# Allegro board GALVOSERVODRV2.brd
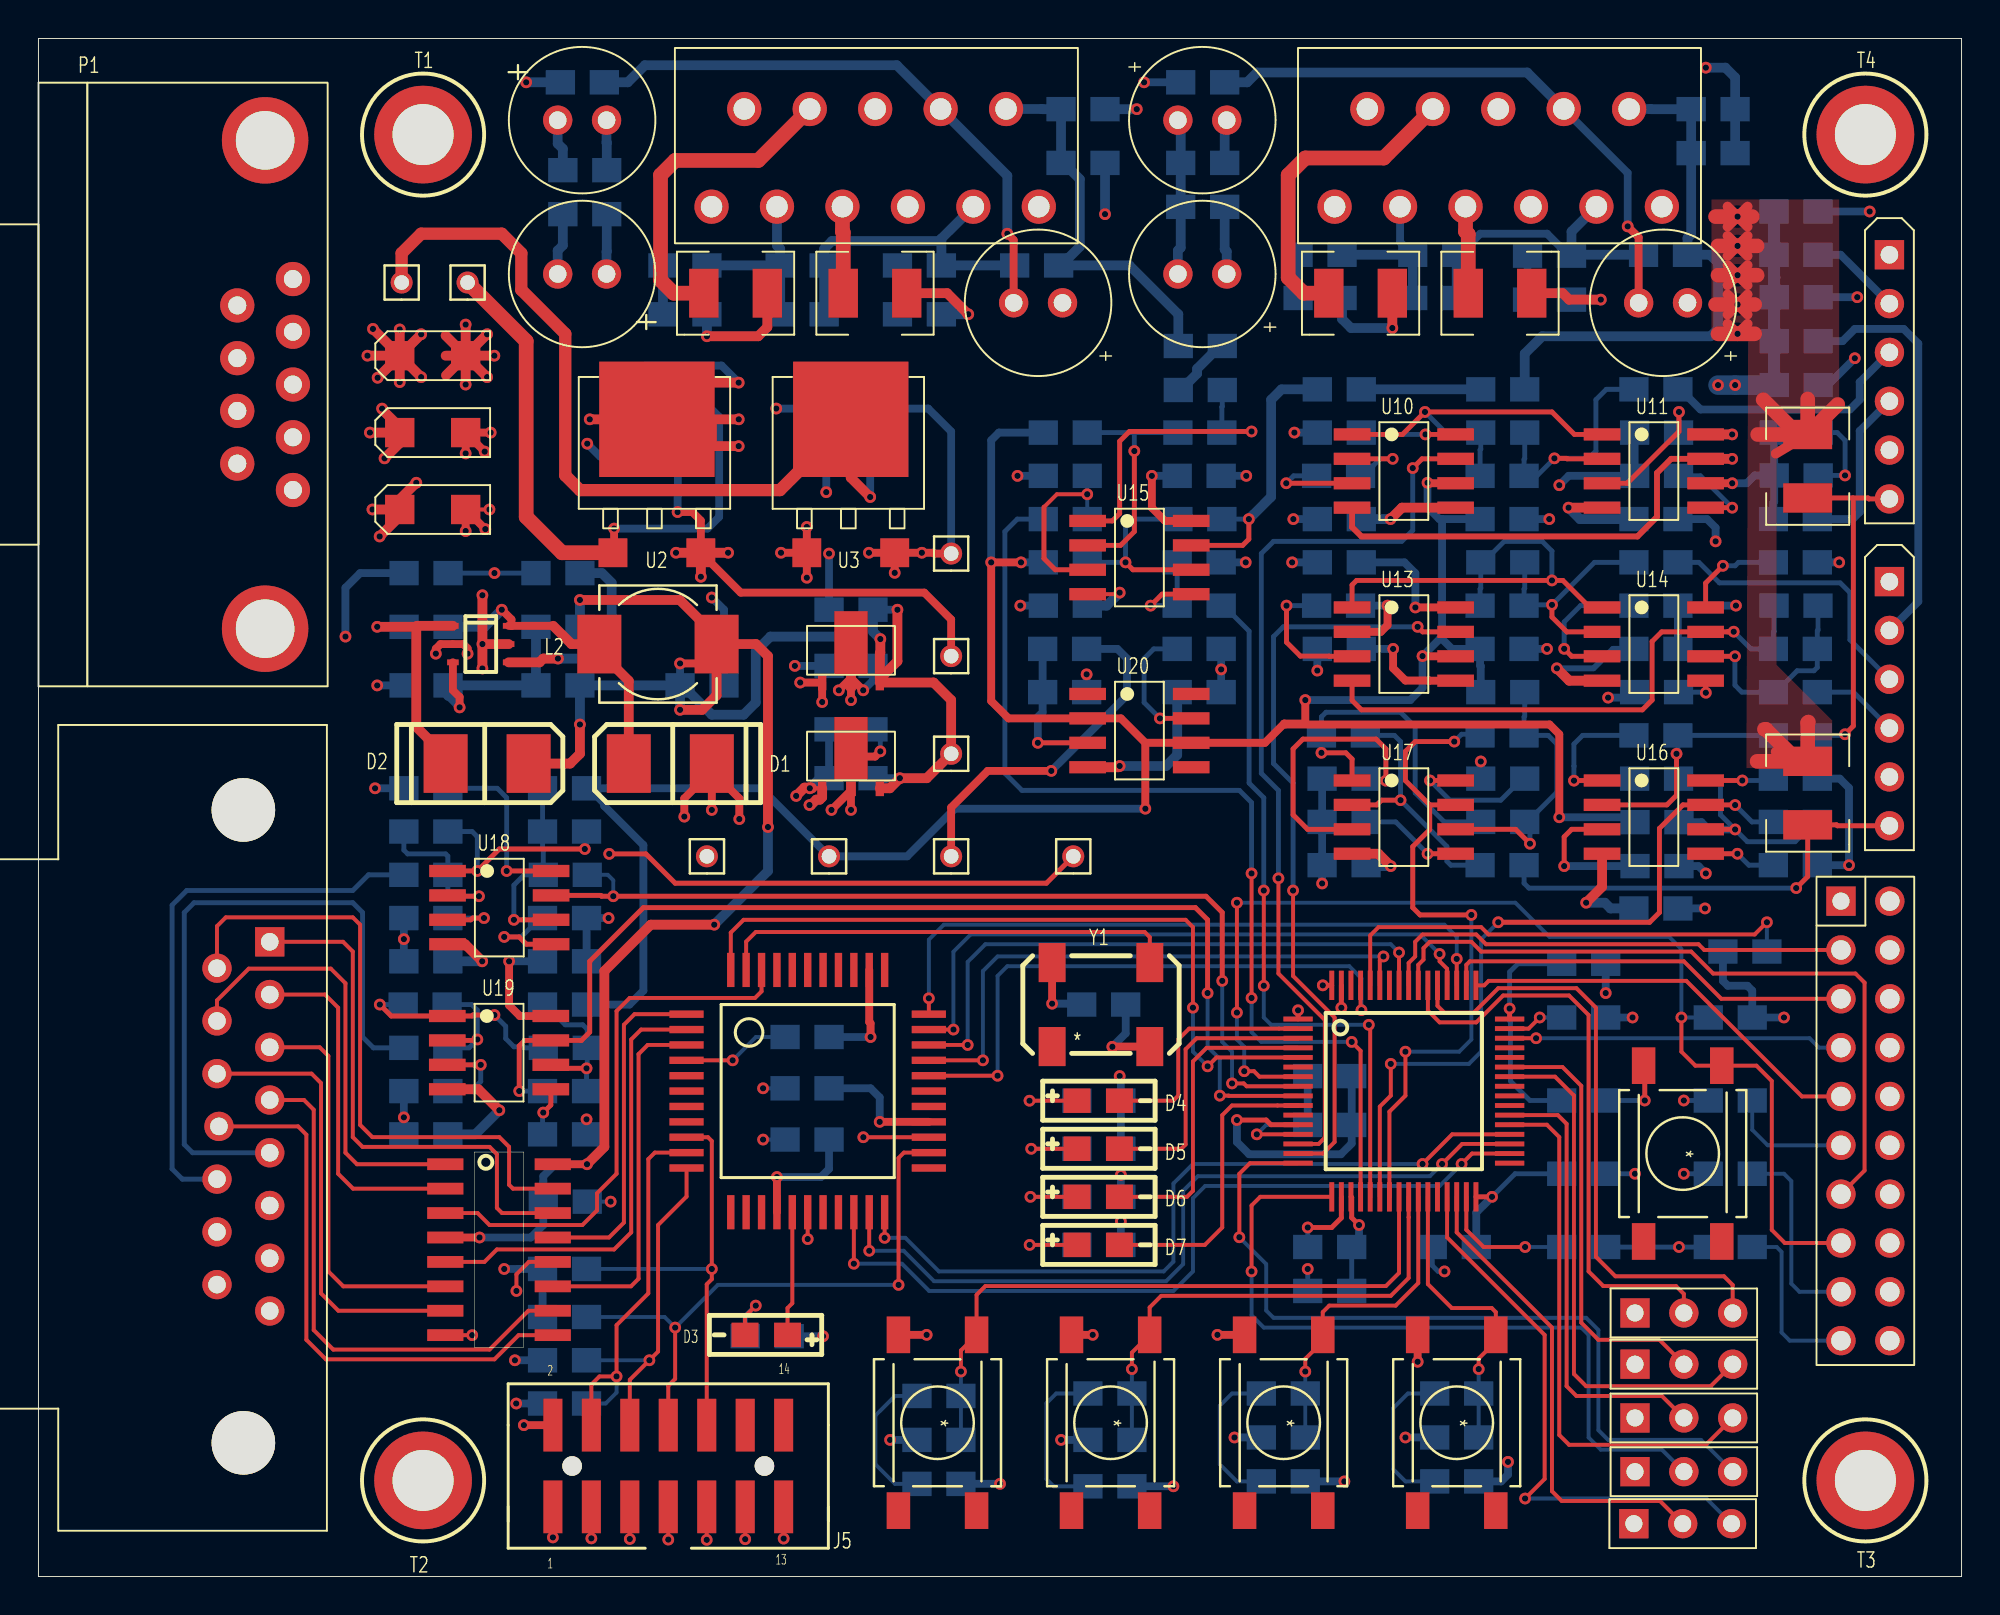
[diagram p0: board, top side]
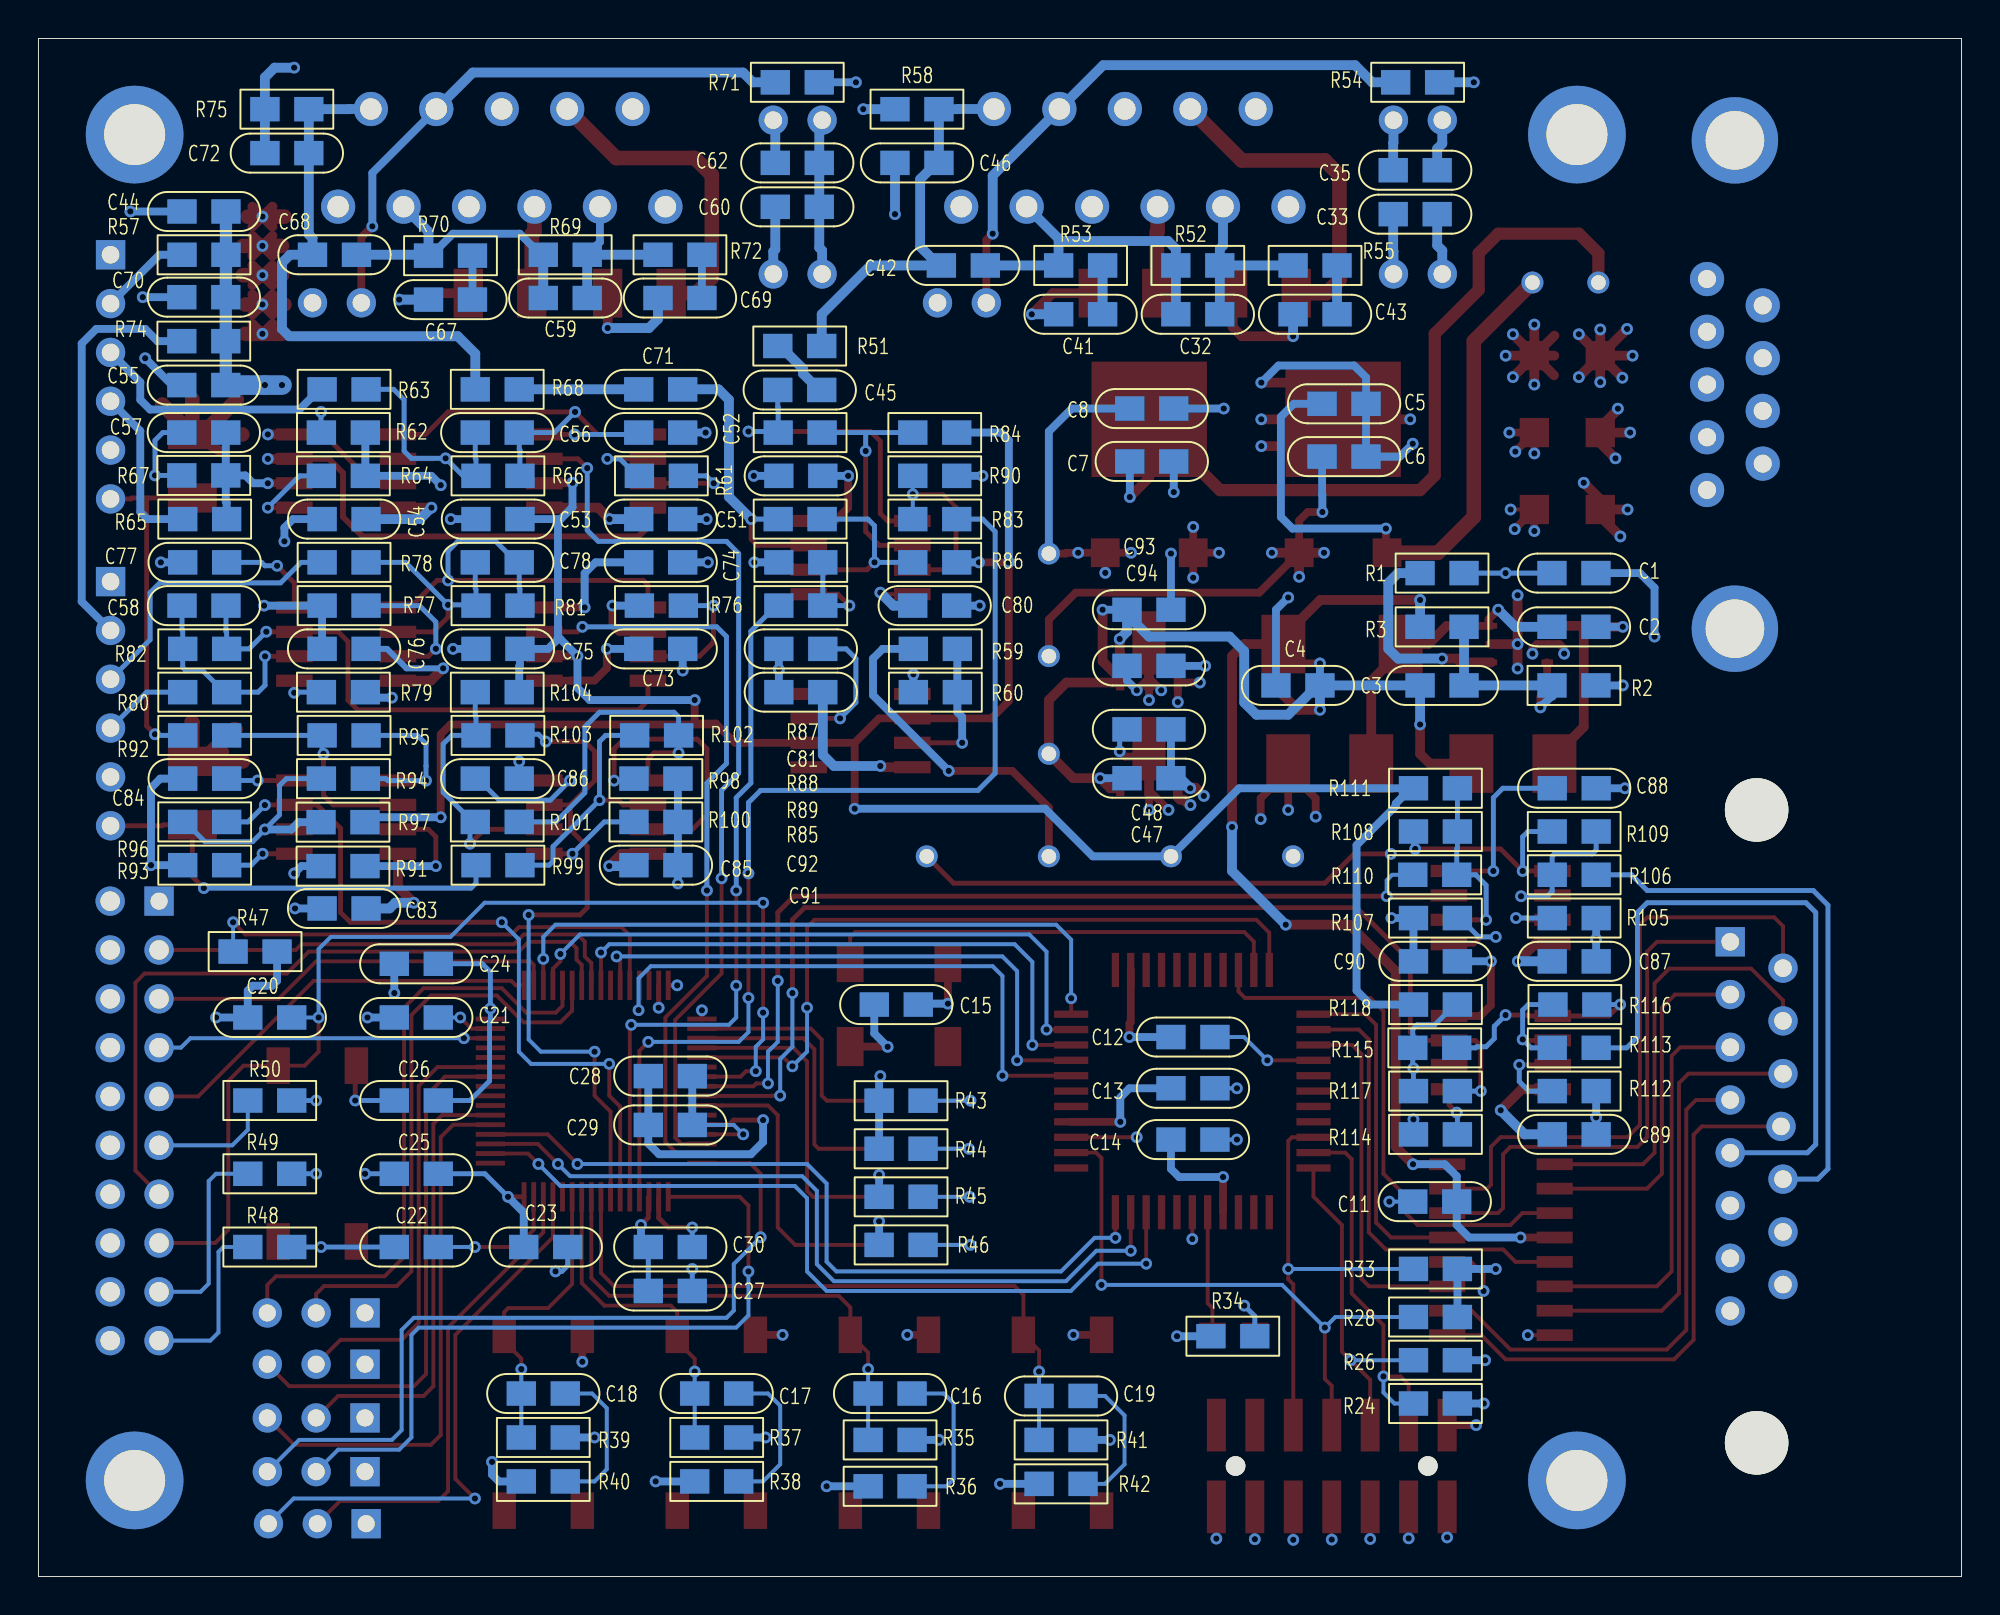
[diagram p1: board, bottom side, seen from below]

Outline 100 x 80 mm; copper layers: TOP, POWER, GND, BOTTOM. Coordinates in mm from the lower left corner of the outline.
Outline path: 0,80 100,80 100,0 0,0 0,80

## Placement (name value [footprint] x y rotation side)
C1  10uF  [0805C]  21.3 52.19 180 bottom
C2  0.01uF  [0805C]  19.01 49.4 0 bottom
C3  1000pF  [0805C]  25.87 46.35 0 bottom
C4  22uF  [0805C]  33.36 46.35 0 bottom
C5  0.1uF  [0805C]  33.25 61 180 bottom
C6  0.1uF  [0805C]  33.25 58.25 180 bottom
C7  0.1uF  [0805C]  43.25 58 180 bottom
C8  0.1uF  [0805C]  43.25 60.75 180 bottom
C11  0.1uF  [0805C]  26.25 19.5 0 bottom
C12  0.1uF  [0805C]  41.11 28.06 180 bottom
C13  0.1uF  [0805C]  41.11 25.39 180 bottom
C14  0.1uF  [0805C]  41.11 22.73 180 bottom
C15  0.1uF  [0805C]  54.25 29.75 0 bottom
C16  0.1uF  [0805C]  54.57 9.52 0 bottom
C17  0.1uF  [0805C]  63.59 9.52 0 bottom
C18  0.1uF  [0805C]  72.61 9.52 0 bottom
C19  0.1uF  [0805C]  45.68 9.39 0 bottom
C20  0.1uF  [0805C]  86.83 29.08 0 bottom
C21  2.2uF  [0805C]  79.21 29.08 0 bottom
C22  2.2uF  [0805C]  79.21 17.14 0 bottom
C23  0.1uF  [0805C]  74.77 17.14 180 bottom
C24  0.1uF  [0805C]  79.21 31.87 0 bottom
C25  0.1uF  [0805C]  79.21 20.95 0 bottom
C26  0.1uF  [0805C]  79.21 24.76 0 bottom
C27  4.7uF  [0805C]  68.29 14.85 180 bottom
C28  0.1uF  [0805C]  66 26.03 0 bottom
C29  1uF  [0805C]  66 23.49 0 bottom
C30  0.1uF  [0805C]  68.29 17.14 180 bottom
C32  15pF  [0805C]  40.86 65.65 180 bottom
C33  0.1uF  [0805C]  29.55 70.86 180 bottom
C34  10uF  [1210]  43.5 66.75 0 top
C35  0.1uF  [0805C]  29.55 73.15 180 bottom
C36  10uF  [1210]  36.25 66.75 180 top
C37  220uF  [CAP2P_D8MM]  29.54 67.75 90 top
C38  220uF  [CAP2P_D8MM]  27 75.75 270 top
C39  100uF  [CAP2P_D8MM]  53.25 66.25 90 top
C41  10uF  [0805C]  46.95 65.65 180 bottom
C42  220pF  [0805C]  53.05 68.19 180 bottom
C43  0.1uF  [0805C]  32.47 65.65 0 bottom
C44  0.1uF  [0805C]  90.25 71 0 bottom
C45  10uF  [0805C]  61.56 61.72 180 bottom
C46  220pF  [0805C]  55.46 73.53 180 bottom
C47  0.1uF  [0805C]  43.4 41.52 180 bottom
C48  0.1uF  [0805C]  43.4 44.06 180 bottom
C51  0.1uF  [0805C]  66.5 55 0 bottom
C52  0.1uF  [0805C]  66.5 59.5 0 bottom
C53  0.1uF  [0805C]  77.25 55 180 bottom
C54  0.1uF  [0805C]  85.25 55 180 bottom
C55  0.1uF  [0805C]  92.55 61.97 180 bottom
C56  22pF  [0805C]  75 59.5 0 bottom
C57  22pF  [0805C]  92.55 59.5 180 bottom
C58  22pF  [0805C]  90.25 50.5 0 bottom
C59  15pF  [0805C]  73.75 66.5 180 bottom
C60  0.1uF  [0805C]  61.68 71.24 180 bottom
C61  10uF  [1210]  76 66.75 0 top
C62  0.1uF  [0805C]  61.68 73.53 180 bottom
C63  10uF  [1210]  68.75 66.75 180 top
C64  220uF  [CAP2P_D8MM]  61.79 67.75 90 top
C65  220uF  [CAP2P_D8MM]  59.25 75.75 270 top
C66  100uF  [CAP2P_D8MM]  85.75 66.25 90 top
C67  10uF  [0805C]  79.72 66.42 180 bottom
C68  220pF  [0805C]  85.75 68.75 180 bottom
C69  0.1uF  [0805C]  65.5 66.5 0 bottom
C70  0.1uF  [0805C]  90.26 66.54 0 bottom
C71  10uF  [0805C]  66.5 61.75 0 bottom
C72  220pF  [0805C]  88.23 74.04 180 bottom
C73  0.1uF  [0805C]  66.5 48.25 0 bottom
C74  0.1uF  [0805C]  66.5 52.75 0 bottom
C75  0.1uF  [0805C]  77.25 48.25 180 bottom
C76  0.1uF  [0805C]  85.25 48.25 180 bottom
C77  0.1uF  [0805C]  92.5 52.75 180 bottom
C78  22pF  [0805C]  75 52.75 0 bottom
C80  0.1uF  [0805C]  52.25 50.5 0 bottom
C81  0.1uF  [0805C]  61.5 57.25 180 bottom
C83  0.1uF  [0805C]  85.25 34.75 180 bottom
C84  0.1uF  [0805C]  92.5 41.5 180 bottom
C85  0.1uF  [0805C]  66.75 37 0 bottom
C86  0.1uF  [0805C]  75 41.5 0 bottom
C87  0.1uF  [0805C]  19 32 0 bottom
C88  0.1uF  [0805C]  19 41 0 bottom
C89  0.1uF  [0805C]  19 23 0 bottom
C90  0.1uF  [0805C]  28.5 32 180 bottom
C91  0.1uF  [0805C]  61.5 46 180 bottom
C92  0.1uF  [0805C]  61.5 48.25 180 bottom
C93  0.1uF  [0805C]  43.4 50.29 180 bottom
C94  0.1uF  [0805C]  43.4 47.37 180 bottom
D1  1N4148W  [SMD_DIODE2]  30.7 42.29 0 top
D2  SS1P3L  [SMD_DIODE2]  25.49 42.29 180 top
D3  LED  [SMD_LED]  38.95 12.57 180 top
D4  LED  [SMD_LED]  54 24.75 0 top
D5  LED  [SMD_LED]  54 22.25 0 top
D6  LED  [SMD_LED]  54 19.75 0 top
D7  LED  [SMD_LED]  54 17.25 0 top
J5  JTAG_CON  [87832-1420]  32.75 5.75 0 top
J6  MCU_JTAG  [IDC20]  95 11 0 top
J7  IRDA  [SIP3]  85.56 8.25 90 top
J8  UART2  [SIP3]  85.56 5.46 90 top
J9  UART3  [SIP3]  85.5 2.75 90 top
J10  UART1  [SIP3]  85.56 11.04 90 top
J11  UART5  [SIP3]  85.56 13.71 90 top
J12  X_MOTOR  [SIP6]  96.25 68.75 0 top
J13  Y_MOTOR  [SIP6]  96.25 51.75 0 top
L2  4.7uH  [INDUC2]  29.16 48.5 0 top
L4  FB  [1206]  20.5 63.5 0 top
L5  FB  [1206]  20.5 55.5 0 top
L6  FB  [1206]  20.5 59.5 0 top
P1  DB9_PowerIN  [DB9HF]  0 62 270 top
P2  XY2-100  [DB15]  12.03 33.01 90 top
R1  100K  [0805R]  25.87 52.19 0 bottom
R2  10K  [0805R]  21.3 46.35 180 bottom
R3  52.3K  [0805R]  25.87 49.4 0 bottom
R24  4.7K  [0805R]  28.5 9 180 bottom
R26  4.7K  [0805R]  28.5 11.25 180 bottom
R28  4.7K  [0805R]  28.5 13.5 180 bottom
R33  4.7K  [0805R]  28.5 16 180 bottom
R34  1K  [0805R]  36.75 12.5 0 bottom
R35  4.7K  [0805R]  56.86 7.11 180 bottom
R36  100  [0805R]  56.86 4.69 180 bottom
R37  4.7K  [0805R]  65.88 7.23 180 bottom
R38  100  [0805R]  65.88 4.95 180 bottom
R39  4.7K  [0805R]  74.89 7.23 180 bottom
R40  100  [0805R]  74.89 4.95 180 bottom
R41  4.7K  [0805R]  47.97 7.11 180 bottom
R42  100  [0805R]  47.97 4.82 180 bottom
R43  100  [0805R]  54 24.75 0 bottom
R44  100  [0805R]  54 22.25 0 bottom
R45  100  [0805R]  54 19.75 0 bottom
R46  100  [0805R]  54 17.25 0 bottom
R47  4.7K  [0805R]  87.59 32.51 0 bottom
R48  10K  [0805R]  86.83 17.14 0 bottom
R49  10K  [0805R]  86.83 20.95 0 bottom
R50  10K  [0805R]  86.83 24.76 0 bottom
R51  1K  [0805R]  61.56 64 180 bottom
R52  10K  [0805R]  40.86 68.19 180 bottom
R53  1K  [0805R]  44.67 68.19 0 bottom
R54  33K  [0805R]  27.14 77.72 0 bottom
R55  10  [0805R]  32.47 68.19 0 bottom
R56  0.2  [1210]  92 57.75 270 top
R57  680  [0805R]  90.25 68.75 0 bottom
R58  33K  [0805R]  55.46 76.32 180 bottom
R59  1K  [0805R]  54.5 48.25 180 bottom
R60  1K  [0805R]  54.5 46 180 bottom
R61  100  [0805R]  68.75 57.25 180 bottom
R62  1K  [0805R]  83 59.5 0 bottom
R63  1K  [0805R]  85.25 61.75 180 bottom
R64  1K  [0805R]  83 57.25 0 bottom
R65  1K  [0805R]  92.5 55 180 bottom
R66  5.6K  [0805R]  77.25 57.25 180 bottom
R67  5.6K  [0805R]  90.26 57.27 0 bottom
R68  1K  [0805R]  75 61.75 0 bottom
R69  10K  [0805R]  73.75 68.75 180 bottom
R70  1K  [0805R]  77.43 68.7 0 bottom
R71  33K  [0805R]  59.4 77.72 0 bottom
R72  10  [0805R]  65.5 68.75 0 bottom
R73  0.2  [1210]  92 40.75 270 top
R74  680  [0805R]  90.26 64.26 0 bottom
R75  33K  [0805R]  88.23 76.32 180 bottom
R76  100  [0805R]  68.75 50.5 180 bottom
R77  1K  [0805R]  85.25 50.5 180 bottom
R78  1K  [0805R]  85.25 52.75 180 bottom
R79  1K  [0805R]  83 46 0 bottom
R80  1K  [0805R]  92.5 46 180 bottom
R81  5.6K  [0805R]  77.25 50.5 180 bottom
R82  5.6K  [0805R]  92.5 48.25 180 bottom
R83  1K  [0805R]  52.25 55 0 bottom
R84  1K  [0805R]  52.25 59.5 0 bottom
R85  1K  [0805R]  61.5 50.5 180 bottom
R86  1K  [0805R]  52.25 52.75 0 bottom
R87  1K  [0805R]  59.25 59.5 0 bottom
R88  1K  [0805R]  59.25 55 0 bottom
R89  1K  [0805R]  61.5 52.75 180 bottom
R90  1K  [0805R]  52.25 57.25 0 bottom
R91  1K  [0805R]  85.31 36.95 180 bottom
R92  1K  [0805R]  92.5 43.75 180 bottom
R93  1K  [0805R]  92.5 37 180 bottom
R94  1K  [0805R]  83 41.5 0 bottom
R95  3K  [0805R]  85.25 43.75 180 bottom
R96  1K  [0805R]  92.5 39.25 180 bottom
R97  1K  [0805R]  83.02 39.24 0 bottom
R98  1K  [0805R]  66.75 41.5 0 bottom
R99  1K  [0805R]  77.25 37 180 bottom
R100  1K  [0805R]  66.75 39.25 0 bottom
R101  1K  [0805R]  75 39.25 0 bottom
R102  3K  [0805R]  69 43.75 180 bottom
R103  1K  [0805R]  77.25 43.75 180 bottom
R104  1K  [0805R]  75 46 0 bottom
R105  1K  [0805R]  19 34.25 0 bottom
R106  3K  [0805R]  19 36.5 0 bottom
R107  1K  [0805R]  28.5 34.25 180 bottom
R108  1K  [0805R]  28.5 38.75 180 bottom
R109  1K  [0805R]  19 38.75 0 bottom
R110  1K  [0805R]  26.25 36.5 0 bottom
R111  1K  [0805R]  28.5 41 180 bottom
R112  1K  [0805R]  19 25.25 0 bottom
R113  3K  [0805R]  19 27.5 0 bottom
R114  1K  [0805R]  28.5 23 180 bottom
R115  1K  [0805R]  26.25 27.5 0 bottom
R116  1K  [0805R]  21.25 29.75 180 bottom
R117  1K  [0805R]  28.5 25.25 180 bottom
R118  1K  [0805R]  28.5 29.75 180 bottom
SW1  PUSHBUTTON  [PUSHBTN_2P]  46.75 8 270 top
SW2  PUSHBUTTON  [PUSHBTN_2P]  55.75 8 270 top
SW3  PUSHBUTTON  [PUSHBTN_2P]  64.75 8 270 top
SW4  PUSHBUTTON  [PUSHBTN_2P]  73.75 8 270 top
SW5  PUSHBUTTON  [PUSHBTN_2P]  85.5 22 270 top
T1  HOLE  [HOLE125]  20 75 0 top
T2  HOLE  [HOLE125]  20 5 0 top
T3  HOLE  [HOLE125]  95 5 0 top
T4  HOLE  [HOLE125]  95 75 0 top
TP1  VDD24V  [TP]  22.31 67.3 0 top
TP2  VDD15V  [TP]  47.46 47.87 0 top
TP3  AGND  [TP]  53.81 37.46 0 top
TP4  VDDN15V  [TP]  47.46 53.21 0 top
TP5  VDDN24V  [TP]  18.89 67.3 0 top
TP6  VDD5V  [TP]  47.46 42.79 0 top
TP7  VREF  [TP]  41.11 37.46 0 top
TP8  VDD3V3  [TP]  34.76 37.46 0 top
TP9  VAA3V3  [TP]  47.46 37.46 0 top
U1  STM32F415RG  [LQFP64]  71 25.25 0 top
U2  MC7815CD2TR4G  [SOT253]  29.87 53.25 0 top
U3  7915/SM  [SOT253]  39.95 53.25 0 top
U4  LM2734YMK  [SOT23-6]  23 48.5 0 top
U6  AM26C32  [SO16]  23.95 17 0 top
U7  XC9572XL_VQ44  [QFP44]  40 25.25 0 top
U8  LM3886/TO220  [TO220-11]  35 71.25 0 top
U9  AMS1117-3.3  [SOT89]  43.75 41 90 top
U10  AD8421  [SO8]  71 57.5 0 top
U11  ADA4077-2  [SO8]  84 57.5 0 top
U12  LM3886/TO220  [TO220-11]  67.4 71.25 0 top
U13  AD8421  [SO8]  71 48.5 0 top
U14  ADA4077-2  [SO8]  84 48.5 0 top
U15  ADA4077-2  [SO8]  57.25 53 0 top
U16  ADA4077-2  [SO8]  84 39.5 0 top
U17  ADA4077-2  [SO8]  71 39.5 0 top
U18  ADA4077-2  [SO8]  23.97 34.79 0 top
U19  ADA4077-2  [SO8]  23.95 27.25 0 top
U20  OP1177  [SO8]  57.25 44 0 top
U21  AMS1117-3.3  [SOT89]  43.75 46.5 90 top
Y1  OSC4_20M  [XTAL_1]  55.25 29.75 0 top

## Library data of the parts
C1-C8 C11-C30 C47 C48 C93 C94 = C
C32 C33 C35 C41-C46 C51-C60 C62 C67-C78 C80 C81 C83-C92 = CAP NP
C34 C36 C61 C63 = CAP POL
C37-C39 C64-C66 = CAP POL: Tolerance: ***; User Part Number: ***
D1 = DIODE
D2 = DIODE SCHOTTKY
D3-D7 = LED
J5 = JTAG_CON
J6 = CON20
J7-J11 = CON3
J12 J13 = CON6: User Part Number: ***
L2 L4-L6 = INDUCTOR
P1 = CONNECTOR DB9
P2 = CONNECTOR DB15_0: User Part Number: ***
R1-R3 R34-R118 = R
R24 R26 R28 R33 = RESISTOR
SW1-SW5 = SW PUSHBUTTON
T1-T4 TP1-TP9 = CON1
U1 = STM32F415RG
U2 = 78XX/SM_1
U3 = 79XX/SM_1
U4 = LM2734
U6 = AM26C32
U7 = XC9572XL_VQ44
U8 U12 = LM3886/TO220_4
U9 U21 = AMS1117
U10 U13 = AD8421
U11 U14-U19 = ADA4077-2
U20 = OP1177
Y1 = OSC4/SM_0

## Footprints (pads in the part's own frame, mm; a bottom-side part is the same pattern mirrored in y, then rotated)
0805C
  rect 1.524x1.27 smd: 1(0,0) 2(2.286,0)
0805R
  rect 1.524x1.27 smd: 1(0,0) 2(2.286,0)
1206
  rect 1.524x1.524 smd: 1(-1.714,0) 2(1.714,0)
1210
  rect 1.524x2.54 smd: 1(-1.651,0) 2(1.651,0)
87832-1420
  round 1.016 hole 1.016 unplated: (-5,0) (5,0)
  rect 0.991x2.743 smd: 1(-6,-2.125) 2(-6,2.125) 3(-4,-2.125) 4(-4,2.125) 5(-2,-2.125) 6(-2,2.125) 7(0,-2.125) 8(0,2.125) 9(2,-2.125) 10(2,2.125) 11(4,-2.125) 12(4,2.125) 13(6,-2.125) 14(6,2.125)
CAP2P_D8MM
  round 1.524 hole 0.914: 1(0,0) 2(0,2.54)
DB9HF
  round 4.496 hole 3.048: (-12.7,11.786) (12.7,11.786)
  round 1.778 hole 0.94: 1(5.486,13.233) 2(2.743,13.233) 3(0,13.233) 4(-2.743,13.233) 5(-5.486,13.233) 6(4.115,10.338) 7(1.372,10.338) 8(-1.372,10.338) 9(-4.115,10.338)
DB15
  round 3.302 hole 3.302 unplated: (-26.06,1.372) (6.858,1.372)
  rect 1.524x1.524 hole 0.914: 1(0,0)
  round 1.524 hole 0.914: 2(-2.743,0) 3(-5.486,0) 4(-8.23,0) 5(-10.973,0) 6(-13.716,0) 7(-16.459,0) 8(-19.202,0) 9(-1.372,2.743) 10(-4.115,2.743) 11(-6.858,2.743) 12(-9.601,2.642) 13(-12.344,2.743) 14(-15.088,2.743) 15(-17.831,2.743)
HOLE125
  round 5.08 hole 3.175: 1(0,0)
IDC20
  rect 1.524x1.524 hole 0.889: 1(-1.27,24.13)
  round 1.524 hole 1.016: 2(1.27,24.13) 3(-1.27,21.59) 4(1.27,21.59) 5(-1.27,19.05) 6(1.27,19.05) 7(-1.27,16.51) 8(1.27,16.51) 9(-1.27,13.97) 10(1.27,13.97) 11(-1.27,11.43) 12(1.27,11.43) 13(-1.27,8.89) 14(1.27,8.89) 15(-1.27,6.35) 16(1.27,6.35) 17(-1.27,3.81) 18(1.27,3.81) 19(-1.27,1.27) 20(1.27,1.27)
INDUC2
  rect 2.286x3.048 smd: 1(0,0) 2(6.096,0)
LQFP64
  rect 1.524x0.254 smd: 1(-5.5,3.749) 2(-5.5,3.249) 3(-5.5,2.749) 4(-5.5,2.249) 5(-5.5,1.75) 6(-5.5,1.25) 7(-5.5,0.75) 8(-5.5,0.25) 9(-5.5,-0.25) 10(-5.5,-0.75) 11(-5.5,-1.25) 12(-5.5,-1.75) 13(-5.5,-2.249) 14(-5.5,-2.749) 15(-5.5,-3.249) 16(-5.5,-3.749) 33(5.5,-3.749) 34(5.5,-3.249) 35(5.5,-2.749) 36(5.5,-2.249) 37(5.5,-1.75) 38(5.5,-1.25) 39(5.5,-0.75) 40(5.5,-0.25) 41(5.5,0.25) 42(5.5,0.75) 43(5.5,1.25) 44(5.5,1.75) 45(5.5,2.249) 46(5.5,2.749) 47(5.5,3.249) 48(5.5,3.749)
  rect 0.254x1.524 smd: 17(-3.749,-5.5) 18(-3.249,-5.5) 19(-2.749,-5.5) 20(-2.249,-5.5) 21(-1.75,-5.5) 22(-1.25,-5.5) 23(-0.75,-5.5) 24(-0.25,-5.5) 25(0.25,-5.5) 26(0.75,-5.5) 27(1.25,-5.5) 28(1.75,-5.5) 29(2.249,-5.5) 30(2.749,-5.5) 31(3.249,-5.5) 32(3.749,-5.5) 49(3.749,5.5) 50(3.249,5.5) 51(2.749,5.5) 52(2.249,5.5) 53(1.75,5.5) 54(1.25,5.5) 55(0.75,5.5) 56(0.25,5.5) 57(-0.25,5.5) 58(-0.75,5.5) 59(-1.25,5.5) 60(-1.75,5.5) 61(-2.249,5.5) 62(-2.749,5.5) 63(-3.249,5.5) 64(-3.749,5.5)
PUSHBTN_2P
  rect 1.905x1.219 smd: (4.572,2.032) (4.572,-2.032) 1(-4.572,-2.032) 2(-4.572,2.032)
QFP44
  rect 1.778x0.381 smd: 1(-6.3,4) 2(-6.3,3.2) 3(-6.3,2.4) 4(-6.3,1.6) 5(-6.3,0.8) 6(-6.3,0) 7(-6.3,-0.8) 8(-6.3,-1.6) 9(-6.3,-2.4) 10(-6.3,-3.2) 11(-6.3,-4) 23(6.3,-4) 24(6.3,-3.2) 25(6.3,-2.4) 26(6.3,-1.6) 27(6.3,-0.8) 28(6.3,0) 29(6.3,0.8) 30(6.3,1.6) 31(6.3,2.4) 32(6.3,3.2) 33(6.3,4)
  rect 0.381x1.778 smd: 12(-4,-6.3) 13(-3.2,-6.3) 14(-2.4,-6.3) 15(-1.6,-6.3) 16(-0.8,-6.3) 17(0,-6.3) 18(0.8,-6.3) 19(1.6,-6.3) 20(2.4,-6.3) 21(3.2,-6.3) 22(4,-6.3) 34(4,6.3) 35(3.2,6.3) 36(2.4,6.3) 37(1.6,6.3) 38(0.8,6.3) 39(0,6.3) 40(-0.8,6.3) 41(-1.6,6.3) 42(-2.4,6.3) 43(-3.2,6.3) 44(-4,6.3)
SIP3
  rect 1.524x1.524 hole 0.889: 1(0,2.54)
  round 1.524 hole 0.889: 2(0,0) 3(0,-2.54)
SIP6
  rect 1.524x1.524 hole 0.914: 1(0,0)
  round 1.524 hole 0.914: 2(0,-2.54) 3(0,-5.08) 4(0,-7.62) 5(0,-10.16) 6(0,-12.7)
SMD_DIODE2
  rect 2.286x3.048 smd: 1(0,0) 2(4.318,0)
SMD_LED
  rect 1.4x1.27 smd: 1(0,0) 2(2.21,0)
SO8
  rect 1.905x0.635 smd: 1(-2.692,1.905) 2(-2.692,0.635) 3(-2.692,-0.635) 4(-2.692,-1.905) 5(2.692,-1.905) 6(2.692,-0.635) 7(2.692,0.635) 8(2.692,1.905)
SO16
  rect 1.88x0.61 smd: 1(-2.794,4.445) 2(-2.794,3.175) 3(-2.794,1.905) 4(-2.794,0.635) 5(-2.794,-0.635) 6(-2.794,-1.905) 7(-2.794,-3.175) 8(-2.794,-4.445) 9(2.794,-4.445) 10(2.794,-3.175) 11(2.794,-1.905) 12(2.794,-0.635) 13(2.794,0.635) 14(2.794,1.905) 15(2.794,3.175) 16(2.794,4.445)
SOT23-6
  rect 0.6x0.3 smd: 1(-1.45,0.95) 2(-1.45,0) 3(-1.45,-0.95) 4(1.45,-0.95) 5(1.45,0) 6(1.45,0.95)
SOT89
  rect 0.813x0.432 smd: 1(0,2.997) 3(0,0)
  custom 4.115x1.727 smd: 2(1.651,1.499)
SOT253
  rect 1.5x1.5 smd: 1(0,0) 3(4.571,0)
  rect 6x6 smd: 2(2.285,6.94)
TO220-11
  round 1.778 hole 1.118: 1(0,0) 2(1.702,5.08) 3(3.404,0) 4(5.105,5.08) 5(6.807,0) 6(8.509,5.08) 7(10.211,0) 8(11.913,5.08) 9(13.614,0) 10(15.316,5.08) 11(17.018,0)
TP
  round 1.143 hole 0.762: 1(0,0)
XTAL_1
  rect 1.397x2.032 smd: 1(-2.54,-2.184) 2(2.54,-2.184) 3(2.54,2.184) 4(-2.54,2.184)

## Nets
AGND: C5.2 C6.2 C7.2 C8.2 C28.2 C29.2 C44.2 C51.1 C52.1 C53.1 C54.1 C55.1 C70.2 C73.1 C74.1 C75.1 C76.1 C77.1 C80.1 C81.1 C83.1 C84.1 C85.1 C86.1 C87.1 C88.1 C89.1 C90.1 C91.1 C92.1 C93.2 C94.2 J12.1 J13.1 L6.2 P2.7 P2.8 P2.15 R60.1 R62.1 R64.1 R77.1 R79.1 R89.1 R90.1 R91.1 R93.1 R98.1 R100.1 R105.1 R107.1 R112.1 R114.1 TP3.1 U1.12(VSSA) U2.2(GND) U3.1(GND) U21.1(GND)
DGND: C1.2 C4.2 C11.2 C12.2 C13.2 C14.2 C15.2 C20.2 C21.2 C22.2 C23.2 C24.2 C25.2 C26.2 C27.2 C30.2 C47.2 C48.2 D1.2(A) J5.1 J5.3 J5.5 J5.7 J5.9 J5.11 J5.13 J6.4 J6.6 J6.8 J6.10 J6.12 J6.14 J6.16 J6.18 J6.20 J7.1 J8.1 J9.1 J10.1 J11.1 L5.2 R2.2 R36.1 R38.1 R40.1 R42.1 R43.2 R44.2 R45.2 R46.2 R47.1 R48.1 R49.1 R50.1 SW1.1 SW2.1 SW3.1 SW4.1 SW5.1 U1.18(VSS1) U1.63(VSS2) U4.2(GND) U6.8(GND) U6.12(G\) U7.4(GND1) U7.17(GND2) U7.25(GND3) U9.1(GND) Y1.2(GND)
GND: L4.1 L5.1 L6.1 P1.3 P1.7 P1.8
PGND: C33.2 C34.2 C35.2 C36.1 C37.2 C38.1 C39.1 C41.1 C43.2 C46.1 C60.2 C61.2 C62.2 C63.1 C64.2 C65.1 C66.1 C67.1 C69.2 C72.1 L4.2 R56.1 R58.1 R73.1 R75.1 U8.7(GND) U12.7(GND)
VDD3V3: C12.1 C13.1 C14.1 C15.1 C23.1 C24.1 C25.1 C26.1 C27.1 C30.1 C48.1 J5.2 J6.1 J6.2 R24.2 R26.2 R28.2 R33.2 R34.2 R35.2 R37.2 R39.2 R41.2 TP8.1 U1.1(VBAT) U1.19(VDD1) U1.32(VDD2) U1.48(VDD3) U1.64(VDD4) U7.15(VCCINT1_3V3) U7.26(VCCIO) U7.35(VCCINT2_3V3) U9.2(VOUT) Y1.4(VCC)
VDD5V: C3.2 C4.1 C11.1 C47.1 C93.1 D2.1(ANODE) L2.2 R3.2 TP6.1 U6.4(G) U6.16(VCC) U9.3(VIN) U21.3(VIN)
VDD15V: C1.1 C6.1 C44.1 C52.2 C55.2 C70.1 C74.2 C77.2 C81.2 C84.2 C86.2 C88.2 C90.2 C92.2 R1.1 R57.1 R74.1 TP2.1 U2.3(VOUT) U4.5(VIN) U10.8(V+) U11.8(VDD) U13.8(V+) U14.8(VDD) U15.8(VDD) U16.8(VDD) U17.8(VDD) U18.8(VDD) U19.8(VDD) U20.7(VDD)
VDDN15V: C8.1 C51.2 C54.2 C73.2 C76.2 C80.2 C83.2 C85.2 C87.2 C89.2 C91.2 TP4.1 U3.3(VOUT) U10.5(V-) U11.4(VEE) U13.5(V-) U14.4(VEE) U15.4(VEE) U16.4(VEE) U17.4(VEE) U18.4(VEE) U19.4(VEE) U20.4(VEE)
VDDNP: C7.1 C35.1 C36.2 C38.2 C62.1 C63.2 C65.2 P1.4 P1.5 P1.9 R54.1 R71.1 TP5.1 U3.2(VIN) U8.4(-VCC) U12.4(-VCC)
VDDP: C5.1 C33.1 C34.1 C37.1 C60.1 C61.1 C64.1 P1.1 P1.2 P1.6 TP1.1 U2.1(VIN) U8.1(+VCC1) U8.5(+VCC5) U12.1(+VCC1) U12.5(+VCC5)
ANALOG_POS1: P2.13 R106.1
ANALOG_POS2: P2.5 R113.1
CLK+: P2.1 U6.14(4A)
CLK-: P2.9 U6.15(4B)
CLK_20M: U7.43(FB1_IO5/GCK1) Y1.3(OUT)
INPOS1_M1: R108.1 R109.2 U18.1(OUTA)
INPOS2_M1: R115.1 R116.2 U19.1(OUTA)
JTAG_TCK: J5.6 R26.1 U7.11(TCK)
JTAG_TDI: J5.10 R33.1 U7.9(TDI)
JTAG_TDO: J5.8 R28.1 U7.24(TDO)
JTAG_TMS: J5.4 R24.1 U7.10(TMS)
KEY1: C19.2 R41.1 SW1.2 U1.24(PC4/ADC12_IN14)
KEY2: C16.2 R35.1 SW2.2 U1.25(PC5/ADC12_IN15)
KEY3: C17.2 R37.1 SW3.2 U1.26(PB0/ADC12_IN8/OTG_HS_ULPI_D1)
KEY4: C18.2 R39.1 SW4.2 U1.27(PB1/ADC12_IN9/OTG_HS_ULPI_D2)
LED1: D4.2(ANODE) U1.2(PC13/RTC_OUT)
LED2: D5.2(ANODE) U1.3(PC14/OSC32_IN)
LED3: D6.2(ANODE) U1.4(PC15/OSC32_OUT)
LED4: D7.2(ANODE) U1.10(PC2/ADC123_IN12/OTG_HS_ULPI_DIR)
NRST: C20.1 J6.15 SW5.2 U1.7(NRST)
STATUS+: P2.6
STATUS-: P2.14
SYNC+: P2.2 U6.2(1A)
SYNC-: P2.10 U6.1(1B)
SYS_JTCK: J6.9 U1.49(PA14/JTCK-SWCLK)
SYS_JTDI: J6.5 U1.50(PA15/JTDI)
SYS_JTDO: J6.13 U1.55(PB3/JTDO)
SYS_JTMS: J6.7 U1.46(PA13/JTMS-SWDIO)
SYS_JTRST: J6.3 U1.56(PB4/NJTRST)
UART5_RX: J11.2 U1.54(PD2/UART5_RX)
UART5_TX: J11.3 U1.53(PC12/UART5_TX)
UART6_IRDA_RX: J7.2 U1.38(PC7/USART6_RX)
UART6_IRDA_TX: J7.3 U1.37(PC6/USART6_TX)
USART1_RX: J10.2 U1.43(PA10/USART1_RX)
USART1_TX: J10.3 U1.42(PA9/USART1_TX)
USART2_RX: J8.2 U1.17(PA3/ADC123_IN3/OTG_HS_ULPI_D0)
USART2_TX: J8.3 U1.16(PA2/ADC123_IN2)
USART3_RX: J9.2 U1.30(PB11/I2C2_SDA/USART3_RX/OTG_HS_)
USART3_TX: J9.3 U1.29(PB10/SPI2_SCK/I2C2_SCL/USART3_T)
VAA3V3: C28.1 C29.1 C94.1 R59.1 TP9.1 U1.13(VDDA) U21.2(VOUT)
VREF: C53.2 C75.2 R84.1 R86.1 R97.1 R104.1 R111.1 R118.1 TP7.1 U10.6(REF) U13.6(REF) U20.2(IN-) U20.6(OUT)
X+: P2.3 U6.6(2A)
X-: P2.11 U6.7(2B)
X_COIL: C32.2 J12.5 R52.2 R55.2 U8.3(OUT)
X_ICOIL_M1: R94.1 R95.2 U16.1(OUTA)
X_ICOIL_SAMP: J12.6 R56.2 R92.1
X_LED_DRV: J12.2 R57.2
X_POS1: J12.3 R63.1
X_POS1_M1: C56.1 R66.2 U10.1(IN-) U11.1(OUTA)
X_POS2: J12.4 R65.1
X_POS2_M1: C57.1 R67.2 U10.4(IN+) U11.7(OUTB)
X_VDRV: C45.1 R87.2 U15.1(OUTA)
XY_CLK: U6.13(4Y) U7.1(FB1_IO7/GCK3)
XY_SYNC: U6.3(1Y) U7.42(FB1_IO4)
XY_X: U6.5(2Y) U7.2(FB1_IO8)
XY_Y: U6.11(3Y) U7.3(FB1_IO9)
Y+: P2.4 U6.10(3A)
Y-: P2.12 U6.9(3B)
Y_COIL: C59.2 J13.5 R69.2 R72.2 U12.3(OUT)
Y_ICOIL_M1: R101.1 R102.2 U17.1(OUTA)
Y_ICOIL_SAMP: J13.6 R73.2 R99.1
Y_LED_DRV: J13.2 R74.2
Y_POS1: J13.3 R78.1
Y_POS1_M1: C78.1 R81.2 U13.1(IN-) U14.1(OUTA)
Y_POS2: J13.4 R80.1
Y_POS2_M1: C58.1 R82.2 U13.4(IN+) U14.7(OUTB)
Y_VDRV: C71.1 R88.2 U15.7(OUTB)
N01384: U1.5(PH0/OSC_IN) U7.44(FB1_IO6/GCK2)
N01394: R110.2 U1.8(PC0/ADC123_IN10/OTG_HS_ULPI_STP) U18.7(OUTB)
N01432: R117.2 U1.9(PC1/ADC123_IN11) U19.7(OUTB)
N01436: U1.14(PA0/WKUP/ADC123_IN0) U10.7(OUT)
N01450: U1.15(PA1/ADC123_IN1) U13.7(OUT)
N01460: R96.2 U1.22(PA6/ADC12_IN6) U16.7(OUTB)
N01470: R103.2 U1.23(PA7/ADC12_IN7) U17.7(OUTB)
N01484: R83.1 U1.20(PA4/ADC12_IN4/DAC_OUT1/OTG_HS_S)
N01500: R85.1 U1.21(PA5/ADC12_IN5/DAC_OUT2/OTG_HS_U)
N01536: U1.59(PB7) U7.30(FB2_IO2)
N01552: U1.61(PB8) U7.29(FB2_IO1)
N01906: U1.57(PB5) U7.31(FB2_IO3)
N01922: U1.34(PB13/SPI2_SCK/USART3_CTS/OTG_HS) U7.20(FB4_IO2)
N02048: U1.35(PB14/SPI2_MISO/USART3_RTS/OTG_H) U7.21(FB4_IO3)
N02076: U1.36(PB15/SPI2_MOSI/OTG_HS_DP) U7.22(FB4_IO4)
N02101: U1.51(PC10/UART4_TX) U7.33(FB2_IO5/GSR)
N02126: U1.52(PC11/UART4_RX) U7.32(FB2_IO4)
N03733: C2.2 D1.1(K) L2.1 U4.6(SW)
N03762: C2.1 D2.2(CATHODE) U4.1(BOOST)
N03928: C3.1 R2.1 R3.1 U4.3(FB)
N04387: R1.2 U4.4(EN)
N23740: C16.1 R36.2
N23869: C17.1 R38.2
N24020: C18.1 R40.2
N24186: C19.1 R42.2
N24377: D4.1(CATHODE) R43.1
N24513: D5.1(CATHODE) R44.1
N24639: D6.1(CATHODE) R45.1
N24729: D7.1(CATHODE) R46.1
N25959: J6.11 R50.2
N26047: J6.17 R49.2
N26055: J6.19 R48.2
N26812: R47.2 U1.60(BOOT0)
N30256: C22.1 U1.31(VCAP_1)
N30260: C21.1 U1.47(VCAP_2)
N31293: U1.39(PC8/USART6_CK)
N31323: U1.40(PC9)
N31361: U1.58(PB6)
N31367: U1.62(PB9)
N41724: C42.1 C46.2 R51.2 R58.2 U8.10(+VIN)
N41785: C32.1 C42.2 R52.1 R53.2 U8.9(-VIN)
N42450: C39.2 R54.2 U8.8(MUTE)
N42886: C41.2 R53.1
N43511: C43.1 R55.1
N44248: C45.2 R51.1
N47571: R61.2 U10.3(RG2)
N47575: R61.1 U10.2(RG1)
N51605: C56.2 R63.2 R66.1 U11.2(INA-)
N51627: R62.2 U11.3(INA+)
N51811: C57.2 R65.2 R67.1 U11.6(INB-)
N51820: R64.2 U11.5(INB+)
N53266: R79.2 U14.5(INB+)
N53270: C58.2 R80.2 R82.1 U14.6(INB-)
N53390: C68.1 C72.2 R68.2 R75.2 U12.10(+VIN)
N53418: C59.1 C68.2 R69.1 R70.2 U12.9(-VIN)
N53738: C66.2 R71.2 U12.8(MUTE)
N53816: C67.2 R70.1
N53906: C69.1 R72.1
N54106: C71.2 R68.1
N54378: R76.1 U13.2(RG1)
N54390: R76.2 U13.3(RG2)
N54692: C78.2 R78.2 R81.1 U14.2(INA-)
N54708: R77.2 U14.3(INA+)
N55384: R85.2 R89.2 U15.5(INB+)
N55388: R86.2 R88.1 U15.6(INB-)
N55726: R84.2 R87.1 U15.2(INA-)
N55742: R83.2 R90.2 U15.3(INA+)
N59109: R94.2 R96.1 R97.2 U16.6(INB-)
N59451: R92.2 R95.1 U16.2(INA-)
N59469: R91.2 U16.3(INA+)
N60591: R93.2 U16.5(INB+)
N64012: R101.2 R103.1 R104.2 U17.6(INB-)
N64298: R99.2 R102.1 U17.2(INA-)
N64302: R98.2 U17.3(INA+)
N64396: R100.2 U17.5(INB+)
N66956: R108.2 R110.1 R111.2 U18.6(INB-)
N67246: R106.2 R109.1 U18.2(INA-)
N67260: R105.2 U18.3(INA+)
N67352: R107.2 U18.5(INB+)
N67613: R115.2 R117.1 R118.2 U19.6(INB-)
N67905: R113.2 R116.1 U19.2(INA-)
N67917: R112.2 U19.3(INA+)
N68011: R114.2 U19.5(INB+)
N69360: R59.2 R60.2 U20.3(IN+)
N83156: D3.2(ANODE) R34.1
N83536: D3.1(CATHODE) U7.16(FB3_IO9)
N87179: U1.11(PC3/ADC123_IN13/OTG_HS_ULPI_NXT)

Pads without a net: J5 12 14; T1 1; T2 1; T3 1; T4 1; U1 6 28 33 41 44 45; U7 5 6 7 8 12 13 14 18 19 23 27 28 34 36 37 38 39 40 41; U8 2 6 11; U12 2 6 11; U20 1 5 8; Y1 1

## Via types
v1: diameter 0.61, hole 0.33, TOP to BOTTOM, 332 vias

## Routing (per net, layer and track width the routed paths; a pad name or vN(x,y) marks a point on that pad's centre or on a via; arc(x,y) is an arc through that point)
AGND: length 327.4
  TOP w0.254: TP3.1 52.41,36.06 33.11,36.06 31.59,37.59 v1(29.68,37.59) ; U1.12 64.09,23.5 63.84,23.74 v1(62.32,23.74)
  TOP w0.406: v1(39.61,46.5) U21.1 v1(40.75,45.48) ; 35.02,60.19 34.5,60.19 ; L6.2 v1(23.51,59.5) ; L6.2 v1(23.2,58.51) ; L6.2 v1(22.21,58.41) ; U3.1 v1(39.95,54.59) ; U3.1 v1(38.61,53.25) ; U3.1 v1(39.95,51.95)
  TOP w0.508: v1(36.41,60.19) 35.02,60.19 35.02,58.8 v1(36.41,58.8) ; v1(28.67,60.19) U2.2 34.5,60.19 34.5,62.1 v1(36.41,62.1)
  GND w0.406: 59.02,36.19 57.75,37.46 TP3.1
  GND w0.508: 40.59,53.73 v1(41.11,53.21) ; v1(41.11,53.21) 41.63,53.73 ; v1(41.11,53.21) 40.59,52.69 ; v1(41.11,53.21) 41.63,52.69 ; 11.19,15.72 P2.7 ; P2.7 12.86,17.39 ; P2.7 11.19,17.39 ; P2.7 12.86,15.72 ; v1(36.41,60.19) 36.94,59.67 ; v1(36.41,60.19) 36.94,60.71 ; v1(36.41,60.19) 35.89,59.67 ; v1(36.41,60.19) 35.89,60.71 ; 62.28,57.77 v1(62.81,57.25) ; v1(62.81,57.25) 62.28,56.73 ; v1(62.81,57.25) 63.33,56.73 ; v1(62.81,57.25) 63.33,57.77 ; v1(28.54,58.92) 29.06,59.44 ; v1(28.54,58.92) 28.02,59.44 ; v1(28.54,58.92) 28.02,58.4 ; v1(28.54,58.92) 29.06,58.4 ; v1(17.5,41) 18.03,41.52 ; v1(17.5,41) 18.03,40.48 ; v1(17.5,41) 16.98,41.52 ; v1(17.5,41) 16.98,40.48 ; 35.89,61.58 v1(36.41,62.1) 36.93,61.58 ; 22.68,59.03 v1(23.2,58.51) 23.85,58.51 ; 86.69,54.36 v1(87.21,53.84) ; v1(87.21,53.84) 86.69,53.32 ; v1(87.21,53.84) 87.73,53.32 ; v1(54.5,46.93) 55.03,47.45 ; v1(54.5,46.93) 55.03,46.4 ; v1(54.5,46.93) 53.98,46.4 ; v1(54.5,46.93) 53.98,47.45 ; 93.93,63.89 v1(94.45,63.37) ; v1(94.45,63.37) 94.97,63.89 ; v1(94.45,63.37) 94.97,62.85 ; v1(94.45,63.37) 93.93,62.85 ; v1(94.58,66.54) 95.1,66.02 ; v1(94.58,66.54) 94.06,66.02 ; v1(94.58,66.54) 94.06,67.06 ; v1(94.58,66.54) 95.1,67.06 ; 87.75,51.02 v1(88.27,50.5) ; v1(88.27,50.5) 88.79,51.02 ; v1(88.27,50.5) 88.79,49.98 ; v1(88.27,50.5) 87.75,49.98 ; 21.69,58.94 v1(22.21,58.41) 22.74,58.94 ; v1(38.61,53.25) 39.13,52.73 ; v1(38.61,53.25) 38.09,53.77 ; v1(38.61,53.25) 39.13,53.77 ; v1(38.61,53.25) 38.09,52.73 ; 27.98,23.26 v1(28.5,23.78) ; v1(28.5,23.78) 29.02,24.3 ; v1(28.5,23.78) 27.98,24.3 ; v1(28.5,23.78) 29.02,23.26 ; 66.23,36.57 v1(66.75,36.05) ; v1(66.75,36.05) 67.27,35.53 ; v1(66.75,36.05) 67.27,36.57 ; v1(66.75,36.05) 66.23,35.53 ; v1(23.51,59.5) 24.04,58.98 ; v1(23.51,59.5) 24.04,60.02 ; v1(23.51,59.5) 22.99,60.02 ; 39.43,55.11 v1(39.95,54.59) ; v1(39.95,54.59) 40.48,55.11 ; v1(39.95,54.59) 40.48,54.07 ; v1(39.95,54.59) 39.43,54.07 ; 50.39,56.73 v1(50.91,57.25) ; v1(50.91,57.25) 51.43,56.73 ; v1(50.91,57.25) 51.43,57.77 ; v1(50.91,57.25) 50.39,57.77 ; 78.04,55.52 v1(78.56,55) ; v1(78.56,55) 79.08,54.48 ; v1(78.56,55) 78.04,54.48 ; 60.98,46.66 v1(61.5,47.18) ; v1(61.5,47.18) 60.98,47.7 ; v1(61.5,47.18) 62.02,46.66 ; v1(61.5,47.18) 62.02,47.7 ; v1(93.64,52.75) 94.16,53.27 ; v1(93.64,52.75) 93.12,53.27 ; v1(93.64,52.75) 93.12,52.23 ; v1(93.64,52.75) 94.16,52.23 ; 29.16,38.11 v1(29.68,37.59) ; v1(29.68,37.59) 30.2,38.11 ; v1(29.68,37.59) 29.16,37.07 ; v1(29.68,37.59) 30.2,37.07 ; 39.09,45.98 v1(39.61,46.5) ; v1(39.61,46.5) 40.13,47.02 ; v1(39.61,46.5) 40.13,45.98 ; TP3.1 54.51,36.76 ; TP3.1 53.11,38.16 ; TP3.1 54.51,38.16 ; TP3.1 53.11,36.76 ; v1(66.5,47.12) 67.02,46.6 ; v1(66.5,47.12) 65.98,47.64 ; v1(66.5,47.12) 67.02,47.64 ; v1(66.5,47.12) 65.98,46.6 ; J12.1 97.09,67.91 ; J12.1 95.41,67.91 ; J12.1 97.09,69.59 ; J12.1 95.41,69.59 ; 77.92,48.77 v1(78.44,48.25) 77.92,47.73 ; 12.86,14.65 P2.8 11.19,14.65 ; 86.14,35.27 v1(86.66,34.75) ; v1(86.66,34.75) 87.18,35.27 ; v1(86.66,34.75) 86.14,34.23 ; v1(86.66,34.75) 87.18,34.23 ; 18.48,33.68 v1(19,33.15) ; v1(19,33.15) 19.52,33.68 ; v1(19,33.15) 19.52,32.63 ; v1(19,33.15) 18.48,32.63 ; 81.1,46.24 v1(81.62,45.71) ; v1(81.62,45.71) 82.14,46.24 ; v1(81.62,45.71) 81.1,45.19 ; v1(81.62,45.71) 82.14,45.19 ; v1(86.7,36.57) 87.22,37.09 ; v1(86.7,36.57) 86.18,36.05 ; v1(86.7,36.57) 87.22,36.05 ; v1(86.7,36.57) 86.18,37.09 ; v1(19,23.88) 19.52,23.36 ; v1(19,23.88) 18.48,24.4 ; v1(19,23.88) 18.48,23.36 ; v1(19,23.88) 19.52,24.4 ; 50.54,49.98 v1(51.06,50.5) ; v1(51.06,50.5) 51.58,49.98 ; v1(51.06,50.5) 51.58,51.02 ; v1(51.06,50.5) 50.54,51.02 ; v1(94.15,37) 94.67,36.48 ; v1(94.15,37) 94.67,37.52 ; v1(94.15,37) 93.63,36.48 ; v1(94.15,37) 93.63,37.52 ; v1(38.36,60.75) 38.89,60.23 ; v1(38.36,60.75) 37.84,60.23 ; v1(38.36,60.75) 38.89,61.27 ; v1(38.36,60.75) 37.84,61.27 ; v1(65.19,52.75) 65.71,53.27 ; v1(65.19,52.75) 64.67,53.27 ; v1(65.19,52.75) 64.67,52.23 ; v1(65.19,52.75) 65.71,52.23 ; 39.43,51.43 v1(39.95,51.95) ; v1(39.95,51.95) 39.43,52.47 ; v1(39.95,51.95) 40.48,51.43 ; v1(39.95,51.95) 40.48,52.47 ; 40.23,44.96 v1(40.75,45.48) ; v1(40.75,45.48) 41.27,44.96 ; v1(40.75,45.48) 40.23,46.01 ; P2.15 10.12,16.02 ; P2.15 8.45,16.02 ; P2.15 10.12,14.35 ; P2.15 8.45,14.35 ; 59.02,36.19 59.02,24.38 59.65,23.74 v1(62.32,23.74) ; 29.12,34.77 v1(29.65,34.25) ; v1(29.65,34.25) 29.12,33.73 ; v1(29.65,34.25) 30.17,33.73 ; v1(28.67,60.19) 29.19,59.67 ; v1(28.67,60.19) 28.15,60.71 ; v1(28.67,60.19) 29.19,60.71 ; v1(28.67,60.19) 28.15,59.67 ; 78.56,56.24 v1(79.08,56.76) ; v1(79.08,56.76) 78.56,57.29 ; v1(79.08,56.76) 79.6,57.29 ; 95.41,52.59 J13.1 ; J13.1 97.09,52.59 ; J13.1 95.41,50.91 ; J13.1 97.09,50.91 ; 94.7,70.48 v1(95.22,71) 95.75,70.48 ; v1(65.25,55) 65.78,55.52 ; v1(65.25,55) 65.78,54.48 ; v1(65.25,55) 64.73,55.52 ; v1(65.25,55) 64.73,54.48 ; v1(65.31,59.5) 65.83,60.02 ; v1(65.31,59.5) 64.79,58.98 ; v1(65.31,59.5) 65.83,58.98 ; v1(65.31,59.5) 64.79,60.02 ; 40.44,56.92 v1(40.96,56.4) ; v1(40.96,56.4) 40.44,55.88 ; v1(40.96,56.4) 41.49,56.92 ; v1(40.96,56.4) 41.49,55.88 ; v1(62.78,52.75) 63.3,53.27 ; v1(62.78,52.75) 62.26,52.23 ; v1(62.78,52.75) 63.3,52.23 ; v1(62.78,52.75) 62.26,53.27 ; v1(39.33,47.37) 39.85,47.89 ; v1(39.33,47.37) 38.81,46.84 ; v1(39.33,47.37) 38.81,47.89 ; v1(36.41,58.8) 36.93,58.27 ; v1(36.41,58.8) 36.93,59.32 ; v1(36.41,58.8) 35.89,58.27 ; v1(36.41,58.8) 35.89,59.32 ; v1(75,42.39) 75.52,42.92 ; v1(75,42.39) 74.48,41.87 ; v1(75,42.39) 74.48,42.92 ; v1(75,42.39) 75.52,41.87
  BOTTOM w0.406: C55.1 93.05,61.97 v1(94.45,63.37) ; C83.1 v1(86.66,34.75) ; R90.1 v1(50.91,57.25) ; R91.1 86.32,36.95 v1(86.7,36.57) ; C93.2 v1(41.11,53.21) ; C84.1 93.67,41.5 94.15,41.02 v1(94.15,37) R93.1 ; v1(28.54,58.92) 29.21,58.25 C6.2 C5.2 30.96,62.37 31.59,62.99 35.52,62.99 v1(36.41,62.1) ; v1(66.75,36.05) C85.1 R100.1 R98.1 ; C52.1 v1(65.31,59.5) ; C81.1 v1(62.81,57.25) ; C51.1 v1(65.25,55) ; C91.1 v1(61.5,47.18) C92.1 ; R62.1 R64.1 79.57,57.25 v1(79.08,56.76) ; C70.2 v1(94.58,66.54) ; C28.2 C29.2 68.29,22.52 67.73,21.97 62.95,21.97 62.32,22.6 v1(62.32,23.74) ; R60.1 v1(54.5,46.93) ; C53.1 v1(78.56,55) ; v1(88.27,50.5) R77.1 C76.1 ; C54.1 86.77,55 87.21,54.55 v1(87.21,53.84) ; C90.1 R107.1 v1(29.65,34.25) ; C87.1 v1(19,33.15) R105.1 ; C7.2 v1(40.96,56.4) ; C73.1 v1(66.5,47.12) ; C77.1 v1(93.64,52.75) ; C94.2 v1(39.33,47.37) ; C8.2 v1(38.36,60.75) ; R112.1 v1(19,23.88) C89.1 ; C88.1 v1(17.5,41) ; R114.1 v1(28.5,23.78) ; C44.2 v1(95.22,71) ; R89.1 v1(62.78,52.75) ; R79.1 82.72,45.71 v1(81.62,45.71) ; C80.1 v1(51.06,50.5) ; C74.1 v1(65.19,52.75) ; C86.1 v1(75,42.39) ; C75.1 v1(78.44,48.25)
DGND: length 328.9
  TOP w0.203: U7.4 v1(36.1,26.85) ; v1(40.11,41) U9.1 ; J5.7 v1(32.75,1.92) ; J5.9 v1(34.75,1.91) ; J5.5 v1(30.75,1.95) ; L5.2 v1(23.45,55.5) ; J5.3 v1(28.75,1.99) ; U6.12 25.5,16.36 24.85,15.72 v1(24.85,14.85) ; U6.8 v1(22.55,12.55) ; U7.17 v1(40,17.55) ; J5.11 v1(36.75,1.94) ; J5.13 v1(38.75,1.97) ; U7.25 v1(42.89,22.85) ; J5.1 v1(26.75,2.04)
  TOP w0.254: SW5.1 83.53,26.51 v1(83.53,24.76) ; U1.63 v1(67.75,29.59) ; v1(66,18.16) 67.25,18.16 67.75,18.66 U1.18
  TOP w0.406: v1(22.31,48) 22.31,48.28 22.09,48.5 U4.2 20.91,48.5 20.66,48.25 20.66,48 v1(20.66,48) ; D1.2 35.01,41.9 ; 35.01,41.9 36.44,40.47 v1(36.44,39.4) ; 35.01,41.9 33.58,40.47 v1(33.58,39.53) ; 35.01,41.9 v1(35.01,39.87) ; Y1.2 55.85,27.57 v1(55.84,27.55) ; v1(22.21,54.38) L5.2 v1(23.24,54.48) ; SW4.1 v1(71.72,11.17) ; SW3.1 v1(61.31,12.57) ; SW2.1 v1(54.82,12.57) ; SW1.1 v1(46.19,12.57)
  TOP w0.508: 40.23,41 40.2,41.03 39.83,41.03 v1(39.4,40.6) ; v1(40.09,40.13) 40.17,40.13 40.45,40.41 40.63,40.41 40.75,40.53 U9.1
  GND w0.508: v1(23.24,54.48) 23.76,53.96 ; v1(23.24,54.48) 22.71,53.96 ; v1(23.24,54.48) 22.71,55 ; v1(23.24,54.48) 23.76,55 ; 49.48,5.34 v1(50,4.82) ; v1(50,4.82) 49.48,4.3 ; v1(50,4.82) 50.52,4.3 ; v1(50,4.82) 50.52,5.34 ; 36.23,2.46 v1(36.75,1.94) ; v1(36.75,1.94) 37.27,1.42 ; v1(36.75,1.94) 37.27,2.46 ; v1(36.75,1.94) 36.23,1.42 ; J6.8 96.97,26.81 ; J6.8 96.97,28.21 ; J6.8 95.57,28.21 ; J6.8 95.57,26.81 ; 72.59,16.39 v1(73.11,15.87) ; v1(73.11,15.87) 73.64,15.35 ; v1(73.11,15.87) 72.59,15.35 ; v1(73.11,15.87) 73.64,16.39 ; v1(83.02,20.95) 83.54,21.47 ; v1(83.02,20.95) 83.54,20.43 ; v1(83.02,20.95) 82.5,20.43 ; v1(83.02,20.95) 82.5,21.47 ; v1(66,16) 66.52,16.52 ; v1(66,16) 65.48,15.48 ; v1(66,16) 65.48,16.52 ; v1(66,16) 66.52,15.48 ; v1(30.75,1.95) 31.27,2.48 ; v1(30.75,1.95) 30.23,1.43 ; v1(30.75,1.95) 31.27,1.43 ; v1(30.75,1.95) 30.23,2.48 ; 84.78,16.62 v1(85.31,17.14) ; v1(85.31,17.14) 84.78,17.66 ; v1(85.31,17.14) 85.83,17.66 ; v1(85.31,17.14) 85.83,16.62 ; 95.57,31.89 J6.4 96.97,31.89 ; 81.8,3.91 J9.1 ; J9.1 81.8,1.59 ; J9.1 84.12,1.59 ; J9.1 84.12,3.91 ; 55.7,25.51 v1(56.22,26.03) ; v1(56.22,26.03) 56.74,26.55 ; v1(56.22,26.03) 56.74,25.51 ; v1(56.22,26.03) 55.7,26.55 ; 71.2,11.69 v1(71.72,11.17) ; v1(71.72,11.17) 72.24,11.69 ; v1(71.72,11.17) 72.24,10.65 ; v1(71.72,11.17) 71.2,10.65 ; 39.48,17.03 v1(40,17.55) ; v1(40,17.55) 40.52,17.03 ; v1(40,17.55) 40.52,18.08 ; v1(40,17.55) 39.48,18.08 ; 37.16,25.92 v1(37.68,25.39) ; v1(37.68,25.39) 38.2,24.87 ; v1(37.68,25.39) 38.2,25.92 ; v1(37.68,25.39) 37.16,24.87 ; J6.10 96.97,25.67 ; J6.10 95.57,24.27 ; J6.10 95.57,25.67 ; J6.10 96.97,24.27 ; 15.44,48.37 v1(15.96,48.89) ; v1(15.96,48.89) 15.44,49.41 ; v1(15.96,48.89) 16.49,48.37 ; v1(15.96,48.89) 16.49,49.41 ; 81.86,6.61 J8.1 ; J8.1 84.18,6.61 ; J8.1 84.18,4.3 ; J8.1 81.86,4.3 ; 85.04,24.24 v1(85.56,24.76) ; v1(85.56,24.76) 85.04,25.28 ; v1(85.56,24.76) 86.08,25.28 ; v1(85.56,24.76) 86.08,24.24 ; v1(67.91,4.95) 68.43,5.47 ; v1(67.91,4.95) 68.43,4.43 ; v1(67.91,4.95) 67.39,5.47 ; v1(67.91,4.95) 67.39,4.43 ; v1(17.62,46.35) 18.14,46.87 ; v1(17.62,46.35) 17.09,46.87 ; v1(17.62,46.35) 17.09,45.83 ; v1(17.62,46.35) 18.14,45.83 ; J6.18 96.97,15.51 ; J6.18 95.57,15.51 ; J6.18 96.97,14.11 ; J6.18 95.57,14.11 ; J6.16 96.97,16.65 ; J6.16 95.57,16.65 ; J6.16 95.57,18.05 ; J6.16 96.97,18.05 ; v1(67.75,29.59) 68.27,30.11 ; v1(67.75,29.59) 67.23,30.11 ; v1(67.75,29.59) 67.23,29.06 ; v1(26.75,2.04) 27.27,1.51 ; v1(26.75,2.04) 26.23,1.51 ; v1(26.75,2.04) 26.23,2.56 ; v1(26.75,2.04) 27.27,2.56 ; v1(42.89,22.85) 43.41,22.33 ; v1(42.89,22.85) 42.37,23.37 ; v1(42.89,22.85) 42.37,22.33 ; v1(66,18.16) 66.52,17.63 ; v1(66,18.16) 66.52,18.68 ; v1(66,18.16) 65.48,18.68 ; v1(66,18.16) 65.48,17.63 ; v1(85.56,20.95) 86.08,20.43 ; v1(85.56,20.95) 86.08,21.47 ; v1(85.56,20.95) 85.04,20.43 ; v1(85.56,20.95) 85.04,21.47 ; 37.16,22.21 v1(37.68,22.73) ; v1(37.68,22.73) 38.2,22.21 ; v1(37.68,22.73) 38.2,23.25 ; v1(37.68,22.73) 37.16,23.25 ; v1(35.01,39.87) 35.54,40.39 ; v1(35.01,39.87) 34.49,40.39 ; v1(35.01,39.87) 35.54,39.35 ; v1(35.01,39.87) 34.49,39.35 ; v1(36.1,26.85) 36.62,27.37 ; v1(36.1,26.85) 35.58,26.33 ; v1(36.1,26.85) 35.58,27.37 ; v1(36.1,26.85) 36.62,26.33 ; 24.33,14.33 v1(24.85,14.85) ; v1(24.85,14.85) 25.38,14.33 ; v1(24.85,14.85) 25.38,15.38 ; v1(20.66,48) 21.18,48.52 ; v1(20.66,48) 20.14,48.52 ; v1(20.66,48) 20.14,47.48 ; v1(20.66,48) 21.18,47.48 ; v1(76.42,5.96) 76.94,5.44 ; v1(76.42,5.96) 76.94,6.49 ; v1(76.42,5.96) 75.89,5.44 ; v1(76.42,5.96) 75.89,6.49 ; 22.03,12.03 v1(22.55,12.55) ; v1(22.55,12.55) 23.08,13.08 ; v1(22.55,12.55) 23.08,12.03 ; v1(22.55,12.55) 22.03,13.08 ; 95.57,30.75 J6.6 ; J6.6 96.97,29.35 ; J6.6 95.57,29.35 ; J6.6 96.97,30.75 ; 81.86,9.89 J10.1 ; J10.1 84.18,9.89 ; J10.1 81.86,12.2 ; J10.1 84.18,12.2 ; 95.57,11.57 J6.20 ; J6.20 95.57,12.97 ; J6.20 96.97,12.97 ; J6.20 96.97,11.57 ; 34.49,50.4 v1(35.01,50.92) ; v1(35.01,50.92) 35.54,51.44 ; v1(35.01,50.92) 35.54,50.4 ; 54.3,12.05 v1(54.82,12.57) ; v1(54.82,12.57) 54.3,13.09 ; v1(54.82,12.57) 55.34,12.05 ; v1(54.82,12.57) 55.34,13.09 ; J6.12 96.97,23.13 ; J6.12 96.97,21.73 ; J6.12 95.57,23.13 ; J6.12 95.57,21.73 ; 55.76,20.37 v1(56.29,20.89) ; v1(56.29,20.89) 56.81,20.37 ; v1(56.29,20.89) 56.81,21.41 ; v1(56.29,20.89) 55.76,21.41 ; v1(38.75,1.97) 39.27,2.5 ; v1(38.75,1.97) 38.23,2.5 ; v1(38.75,1.97) 38.23,1.45 ; v1(38.75,1.97) 39.27,1.45 ; 55.76,17.95 v1(56.29,18.47) ; v1(56.29,18.47) 56.81,17.95 ; v1(56.29,18.47) 55.76,19 ; v1(56.29,18.47) 56.81,19 ; 82.37,28.56 v1(82.89,29.08) ; v1(82.89,29.08) 82.37,29.6 ; v1(82.89,29.08) 83.41,29.6 ; v1(82.89,29.08) 83.41,28.56 ; 35.92,38.88 v1(36.44,39.4) ; v1(36.44,39.4) 35.92,39.92 ; v1(36.44,39.4) 36.97,38.88 ; v1(36.44,39.4) 36.97,39.92 ; 40.62,40.65 v1(40.09,40.13) 39.57,39.61 ; 21.69,54.9 v1(22.21,54.38) ; v1(22.21,54.38) 21.69,53.86 ; v1(22.21,54.38) 22.74,53.86 ; v1(22.21,54.38) 22.74,54.9 ; 45.66,13.09 v1(46.19,12.57) ; v1(46.19,12.57) 46.71,13.09 ; v1(46.19,12.57) 46.71,12.05 ; v1(46.19,12.57) 45.66,12.05 ; 39.59,41.52 v1(40.11,41) ; v1(40.11,41) 40.63,41.52 ; v1(40.11,41) 40.63,40.48 ; v1(83.53,24.76) 84.05,24.24 ; v1(83.53,24.76) 84.05,25.28 ; v1(83.53,24.76) 83.01,24.24 ; v1(83.53,24.76) 83.01,25.28 ; 29.23,18.98 v1(29.75,19.5) 30.28,18.98 ; v1(33.58,39.53) 34.11,39 ; v1(33.58,39.53) 33.06,39 ; v1(33.58,39.53) 33.06,40.05 ; v1(33.58,39.53) 34.11,40.05 ; 38.88,40.08 v1(39.4,40.6) 38.88,41.12 ; 21.79,47.48 v1(22.31,48) 21.79,48.52 ; 35.27,2.43 v1(34.75,1.91) 34.23,2.43 ; 58.5,4.17 v1(59.02,4.69) ; v1(59.02,4.69) 58.5,5.22 ; v1(59.02,4.69) 59.54,5.22 ; v1(59.02,4.69) 59.54,4.17 ; J6.14 96.97,19.19 ; J6.14 95.57,20.59 ; J6.14 96.97,20.59 ; J6.14 95.57,19.19 ; 80.97,30.87 v1(81.5,30.35) ; v1(81.5,30.35) 82.02,30.87 ; v1(81.5,30.35) 80.97,29.83 ; v1(81.5,30.35) 82.02,29.83 ; 81.86,9.41 J7.1 ; J7.1 81.86,7.09 ; J7.1 84.18,7.09 ; J7.1 84.18,9.41 ; 32.23,2.44 v1(32.75,1.92) 33.27,2.44 ; 55.32,28.08 v1(55.84,27.55) ; v1(55.84,27.55) 55.32,27.03 ; v1(55.84,27.55) 56.36,28.08 ; v1(55.84,27.55) 56.36,27.03 ; 81.86,14.87 J11.1 ; J11.1 84.18,14.87 ; J11.1 81.86,12.56 ; J11.1 84.18,12.56 ; 90.25,28.56 v1(90.77,29.08) ; v1(90.77,29.08) 91.29,28.56 ; v1(90.77,29.08) 90.25,29.6 ; v1(90.77,29.08) 91.29,29.6 ; 22.93,56.02 v1(23.45,55.5) ; v1(23.45,55.5) 23.97,56.02 ; v1(23.45,55.5) 22.93,54.98 ; v1(23.45,55.5) 23.97,54.98 ; 28.23,2.51 v1(28.75,1.99) ; v1(28.75,1.99) 29.27,2.51 ; v1(28.75,1.99) 28.23,1.46 ; v1(28.75,1.99) 29.27,1.46 ; 60.79,12.05 v1(61.31,12.57) ; v1(61.31,12.57) 60.79,13.09 ; v1(61.31,12.57) 61.83,12.05 ; v1(61.31,12.57) 61.83,13.09
  BOTTOM w0.203: C13.2 v1(37.68,25.39) ; C14.2 v1(37.68,22.73) ; C11.2 v1(29.75,19.5) ; C12.2 37.31,28.06 v1(36.1,26.85)
  BOTTOM w0.254: C27.2 v1(66,16) ; R48.1 v1(85.31,17.14) C22.2 ; C25.2 v1(83.02,20.95) ; C23.2 72.48,16.17 72.78,15.87 v1(73.11,15.87) ; R49.1 v1(85.56,20.95) ; R50.1 v1(85.56,24.76) ; C26.2 v1(83.53,24.76) ; C30.2 v1(66,18.16)
  BOTTOM w0.406: R2.2 v1(17.62,46.35) ; R38.1 v1(67.91,4.95) ; R45.2 v1(56.29,20.89) ; v1(90.77,29.08) C20.2 89.12,30.47 88.86,30.73 87.85,30.73 87.59,30.98 R47.1 ; v1(35.01,50.92) 35.65,50.29 C4.2 ; C15.2 56.54,28.25 v1(55.84,27.55) ; R40.1 76.06,4.95 76.42,5.3 v1(76.42,5.96) ; R44.2 R43.2 56.29,25.97 v1(56.22,26.03) ; v1(15.96,48.89) 15.96,51.43 16.73,52.19 C1.2 ; R42.1 v1(50,4.82) ; C24.2 v1(81.5,30.35) ; C47.2 C48.2 ; R46.2 v1(56.29,18.47) ; R36.1 v1(59.02,4.69) ; C21.2 v1(82.89,29.08)
  BOTTOM w0.508: C47.2 40.63,41.52 v1(40.11,41)
GND: length 86.9
  TOP w0.508: v1(17.23,59.5) L6.1 ; L6.1 18.79,59.78 17.87,60.7 v1(17.87,60.75) ; L6.1 18.79,58.95 v1(18,58.16) ; v1(17.74,54.1) 18.79,55.14 L5.1 ; v1(19.9,62.38) L4.1 ; L4.1 v1(18.79,62.13) ; L4.1 v1(18.79,64.86) ; L4.1 v1(17.64,62.35) ; L4.1 v1(17.39,64.89) ; L4.1 v1(17.11,63.5) ; L4.1 v1(19.9,64.62) ; L5.1 18.79,56.03 v1(19.65,56.89) ; L5.1 v1(17.37,55.5)
  GND w0.508: 12.26,62.97 P1.3 ; P1.3 14.2,61.03 ; P1.3 14.2,62.97 ; P1.3 12.26,61.03 ; 19.38,62.91 v1(19.9,62.38) 19.38,61.86 ; 18.26,64.34 v1(18.79,64.86) ; v1(18.79,64.86) 19.31,64.34 ; v1(18.79,64.86) 18.26,65.39 ; v1(18.79,64.86) 19.31,65.39 ; P1.7 11.31,61.6 ; P1.7 11.31,59.66 ; P1.7 9.37,61.6 ; P1.7 9.37,59.66 ; 9.37,62.4 P1.8 ; P1.8 11.31,64.34 ; P1.8 9.37,64.34 ; P1.8 11.31,62.4 ; 16.87,64.37 v1(17.39,64.89) ; v1(17.39,64.89) 17.92,64.37 ; v1(17.39,64.89) 16.87,65.41 ; v1(17.39,64.89) 17.92,65.41 ; 17.47,58.68 v1(18,58.16) ; v1(18,58.16) 18.52,57.64 ; v1(18,58.16) 18.52,58.68 ; v1(18,58.16) 17.47,57.64 ; 17.12,61.83 v1(17.64,62.35) ; v1(17.64,62.35) 17.12,62.87 ; v1(17.64,62.35) 18.16,62.87 ; v1(17.64,62.35) 18.16,61.83 ; v1(17.23,59.5) 17.76,58.98 ; v1(17.23,59.5) 16.71,58.98 ; v1(17.23,59.5) 17.76,60.02 ; v1(17.23,59.5) 16.71,60.02 ; v1(17.74,54.1) 18.26,53.58 ; v1(17.74,54.1) 17.22,53.58 ; v1(17.74,54.1) 18.26,54.62 ; v1(17.74,54.1) 17.22,54.62 ; v1(17.87,60.75) 18.39,61.27 ; v1(17.87,60.75) 17.35,60.22 ; v1(17.87,60.75) 18.39,60.22 ; v1(17.87,60.75) 17.35,61.27 ; 18.26,61.6 v1(18.79,62.13) ; v1(18.79,62.13) 19.31,61.6 ; v1(18.79,62.13) 19.31,62.65 ; v1(18.79,62.13) 18.26,62.65 ; v1(17.11,63.5) 17.63,64.02 ; v1(17.11,63.5) 17.63,62.98 ; v1(17.11,63.5) 16.59,62.98 ; v1(17.11,63.5) 16.59,64.02 ; v1(17.37,55.5) 17.89,56.02 ; v1(17.37,55.5) 16.85,56.02 ; v1(17.37,55.5) 16.85,54.98 ; v1(17.37,55.5) 17.89,54.98 ; 19.38,65.14 v1(19.9,64.62) 19.38,64.09 ; 19.13,57.41 v1(19.65,56.89) 19.13,56.37
  GND w0.762: P1.8 8.6,63.37 ; P1.8 P1.7 ; P1.8 11.86,63.37 ; P1.3 11.68,62 ; P1.3 13.23,60.77 ; P1.3 15.3,62 ; P1.7 8.53,60.63 ; P1.7 10.34,59.42 ; P1.7 11.97,60.63
PGND: length 186
  TOP w0.508: 87.83,68.69 v1(88.35,69.21) ; v1(88.35,69.21) 87.83,69.73 ; v1(88.35,69.21) 88.88,68.69 ; v1(88.35,69.21) 88.88,69.73 ; C34.2 47.25,66.75 v1(48.35,65.65) ; 90.34,58.4 R56.1 90.34,60.4 ; L4.2 v1(23.71,63.5) ; L4.2 21.18,63.5 ; L4.2 v1(22.21,65.12) ; L4.2 v1(23.33,62.38) ; L4.2 21.19,62.48 ; L4.2 21.17,64.54 ; L4.2 v1(23.33,64.62) ; L4.2 v1(22.21,62) ; 87.83,65.64 v1(88.35,66.16) ; v1(88.35,66.16) 87.83,66.68 ; v1(88.35,66.16) 88.88,65.64 ; v1(88.35,66.16) 88.88,66.68 ; 90.34,43.4 R73.1 90.34,42.9 ; C63.1 v1(70.4,64.94) ; v1(34.76,64.51) 37.43,64.51 37.9,64.98 C36.1 ; 87.83,67.16 v1(88.35,67.69) ; v1(88.35,67.69) 88.88,68.21 ; v1(88.35,67.69) 88.88,67.16 ; v1(88.35,67.69) 87.83,68.21 ; 87.83,71.26 v1(88.35,70.73) ; v1(88.35,70.73) 87.83,70.21 ; v1(88.35,70.73) 88.88,70.21 ; v1(88.35,70.73) 88.88,71.26 ; C61.2 79.26,66.75 79.59,66.42 v1(81.24,66.42) ; 87.83,65.16 v1(88.35,64.64) 88.88,65.16
  TOP w0.762: 93.56,60.96 R56.1 ; R56.1 91.49,59.4 ; R56.1 92,61.25 ; 89.68,61.21 91.49,59.4 ; 91.49,59.4 89.4,59.4 ; 89.37,42.4 91.49,42.4 ; 91.49,42.4 R73.1 92,44.41 92.04,44.44 ; 91.49,42.4 89.83,44.06 89.75,44.06 ; 87.21,66.16 v1(88.35,66.16) 89.24,66.16 ; 89.24,64.64 v1(88.35,64.64) 87.34,64.64 ; 87.21,70.73 v1(88.35,70.73) 89.12,70.73 ; 87.34,69.21 v1(88.35,69.21) 89.37,69.21 ; 87.34,67.69 v1(88.35,67.69) 89.37,67.69
  GND w0.508: 54.94,71.38 v1(55.46,70.86) ; v1(55.46,70.86) 55.98,71.38 ; v1(55.46,70.86) 54.94,70.34 ; v1(55.46,70.86) 55.98,70.34 ; 22.81,64.09 v1(23.33,64.62) ; v1(23.33,64.62) 23.85,64.09 ; v1(23.33,64.62) 23.85,65.14 ; 80.72,65.89 v1(81.24,66.42) ; v1(81.24,66.42) 81.76,66.94 ; v1(81.24,66.42) 80.72,66.94 ; v1(81.24,66.42) 81.76,65.89 ; v1(23.71,63.5) 24.23,62.98 ; v1(23.71,63.5) 23.18,64.02 ; v1(23.71,63.5) 23.18,62.98 ; v1(23.71,63.5) 24.23,64.02 ; 84.91,65.41 C66.1 ; C66.1 84.91,67.09 ; C66.1 86.59,67.09 ; C66.1 86.59,65.41 ; 26.16,66.91 C37.2 ; C37.2 26.16,68.59 ; C37.2 27.84,68.59 ; C37.2 27.84,66.91 ; v1(88.35,66.16) 88.88,66.68 ; v1(88.35,66.16) 87.83,65.64 ; v1(88.35,66.16) 88.88,65.64 ; v1(88.35,66.16) 87.83,66.68 ; 26.16,74.91 C38.1 ; C38.1 27.84,74.91 ; C38.1 26.16,76.59 ; C38.1 27.84,76.59 ; 22.81,61.86 v1(23.33,62.38) ; v1(23.33,62.38) 23.85,62.91 ; v1(23.33,62.38) 23.85,61.86 ; v1(23.33,62.38) 22.81,62.91 ; 56.59,76.84 v1(57.11,76.32) ; v1(57.11,76.32) 57.63,75.8 ; v1(57.11,76.32) 57.63,76.84 ; v1(57.11,76.32) 56.59,75.8 ; 87.83,71.26 v1(88.35,70.73) ; v1(88.35,70.73) 87.83,70.21 ; v1(88.35,70.73) 88.88,71.26 ; v1(88.35,70.73) 88.88,70.21 ; 52.41,65.41 C39.1 ; C39.1 54.09,67.09 ; C39.1 54.09,65.41 ; C39.1 52.41,67.09 ; C64.2 60.09,68.59 ; C64.2 58.41,68.59 ; C64.2 58.41,66.91 ; C64.2 60.09,66.91 ; 35.28,65.03 v1(34.76,64.51) 34.24,65.03 ; 87.83,65.16 v1(88.35,64.64) 88.88,65.16 ; 69.88,64.42 v1(70.4,64.94) ; v1(70.4,64.94) 70.92,65.46 ; v1(70.4,64.94) 70.92,64.42 ; v1(70.4,64.94) 69.88,65.46 ; 87.83,67.16 v1(88.35,67.69) ; v1(88.35,67.69) 87.83,68.21 ; v1(88.35,67.69) 88.88,67.16 ; v1(88.35,67.69) 88.88,68.21 ; 87.83,68.69 v1(88.35,69.21) ; v1(88.35,69.21) 88.88,69.73 ; v1(88.35,69.21) 88.88,68.69 ; v1(88.35,69.21) 87.83,69.73 ; 47.83,66.18 v1(48.35,65.65) ; v1(48.35,65.65) 48.87,66.18 ; v1(48.35,65.65) 47.83,65.13 ; v1(48.35,65.65) 48.87,65.13 ; v1(86.7,78.48) 87.22,79 ; v1(86.7,78.48) 86.18,77.96 ; v1(86.7,78.48) 87.22,77.96 ; v1(86.7,78.48) 86.18,79 ; 44.33,70.37 U8.7 46.09,70.37 ; 21.69,62.52 v1(22.21,62) ; v1(22.21,62) 22.74,62.52 ; v1(22.21,62) 22.74,61.48 ; v1(22.21,62) 21.69,61.48 ; 60.09,76.59 C65.1 58.41,76.59 ; 21.69,65.64 v1(22.21,65.12) ; v1(22.21,65.12) 22.74,65.64 ; v1(22.21,65.12) 21.69,64.6 ; 76.73,70.37 U12.7 78.49,70.37
  GND w0.762: U8.7 45.21,69.05 ; U12.7 77.61,69.26
  BOTTOM w0.508: C33.2 27.27,69.24 27,68.97 C37.2 ; C64.2 59.25,68.97 59.4,69.12 C60.2 C62.2 59.4,75.6 C65.1 ; C69.2 67.79,65.41 68.26,64.94 v1(70.4,64.94) ; C35.2 27.27,74.26 27,74.53 C38.1 ; C72.1 R75.1 88.23,77.97 87.72,78.48 v1(86.7,78.48) ; C46.1 v1(55.46,70.86) ; C41.1 v1(48.35,65.65) ; R58.1 v1(57.11,76.32) ; C67.1 v1(81.24,66.42) ; C43.2 v1(34.76,64.51)
VDD3V3: length 143.3
  TOP w0.254: U1.48 v1(76.5,29.54) ; v1(68.67,18.28) 68.29,18.66 68.29,19.71 U1.19 ; U1.32 v1(75.58,19.75) ; U1.64 v1(66.79,30.75) ; U1.1 v1(65.5,29.45)
  TOP w0.406: 42.25,40.89 v1(42.25,39.87) ; 42.25,40.89 U9.2 43.51,42.65 v1(43.78,42.92) ; 42.25,40.89 v1(41.24,39.87) ; J5.2 v1(25.24,7.87) ; U7.35 43.2,28.84 43.27,28.77 v1(43.27,28.06) ; Y1.4 v1(52.71,29.8) ; U7.15 v1(38.4,20.78) ; U7.26 v1(43.74,23.65)
  POWER w0.508: 68.15,18.8 v1(68.67,18.28) ; v1(68.67,18.28) 69.19,18.8 ; v1(68.67,18.28) 68.15,17.76 ; v1(68.67,18.28) 69.19,17.76 ; TP8.1 36.28,37.46 ; TP8.1 35.46,38.16 ; TP8.1 35.46,36.76 ; 40.72,39.35 v1(41.24,39.87) ; v1(41.24,39.87) 41.76,40.39 ; v1(41.24,39.87) 41.76,39.35 ; 41.73,40.4 v1(42.25,39.87) ; v1(42.25,39.87) 42.77,39.35 ; v1(42.25,39.87) 42.77,40.4 ; v1(42.25,39.87) 41.73,39.35 ; 92.57,36.29 J6.1 ; J6.1 94.89,36.29 ; J6.1 92.57,33.97 ; J6.1 94.89,33.97 ; v1(38.4,20.78) 38.92,20.26 ; v1(38.4,20.78) 37.88,21.3 ; v1(38.4,20.78) 37.88,20.26 ; v1(38.4,20.78) 38.92,21.3 ; v1(62.19,7.23) 62.71,6.71 ; v1(62.19,7.23) 61.67,7.76 ; v1(62.19,7.23) 61.67,6.71 ; v1(62.19,7.23) 62.71,7.76 ; v1(71.08,7.23) 71.6,7.76 ; v1(71.08,7.23) 70.56,7.76 ; v1(71.08,7.23) 70.56,6.71 ; v1(71.08,7.23) 71.6,6.71 ; 42.75,28.58 v1(43.27,28.06) ; v1(43.27,28.06) 43.79,28.58 ; v1(43.27,28.06) 43.79,27.54 ; v1(43.27,28.06) 42.75,27.54 ; v1(75.58,19.75) 76.11,19.23 ; v1(75.58,19.75) 76.11,20.27 ; v1(75.58,19.75) 75.06,20.27 ; v1(75.58,19.75) 75.06,19.23 ; 24.22,15.35 v1(24.22,16) 24.74,16.52 ; 40.28,11.98 v1(40.8,12.5) ; v1(40.8,12.5) 41.32,11.98 ; v1(40.8,12.5) 41.32,13.02 ; v1(40.8,12.5) 40.28,13.02 ; v1(65.5,29.45) 66.02,29.97 ; v1(65.5,29.45) 64.98,28.93 ; v1(65.5,29.45) 66.02,28.93 ; v1(65.5,29.45) 64.98,29.97 ; v1(24.78,11.25) 25.3,11.77 ; v1(24.78,11.25) 24.25,11.77 ; v1(24.78,11.25) 24.25,10.73 ; v1(24.78,11.25) 25.3,10.73 ; v1(66.79,30.75) 67.31,30.23 ; v1(66.79,30.75) 66.26,31.27 ; v1(66.79,30.75) 66.26,30.23 ; v1(66.79,30.75) 67.31,31.27 ; v1(25.24,7.87) 25.76,7.35 ; v1(25.24,7.87) 25.76,8.4 ; v1(25.24,7.87) 24.72,7.35 ; v1(25.24,7.87) 24.72,8.4 ; 52.65,7.63 v1(53.18,7.11) ; v1(53.18,7.11) 53.7,6.59 ; v1(53.18,7.11) 52.65,6.59 ; v1(53.18,7.11) 53.7,7.63 ; 24.32,9.52 v1(24.84,9) ; v1(24.84,9) 25.36,8.48 ; v1(24.84,9) 24.32,8.48 ; v1(24.84,9) 25.36,9.52 ; v1(76.5,29.54) 77.02,29.02 ; v1(76.5,29.54) 75.98,29.02 ; v1(76.5,29.54) 77.02,30.06 ; v1(76.5,29.54) 75.98,30.06 ; 43.76,7.63 v1(44.29,7.11) ; v1(44.29,7.11) 43.76,6.59 ; v1(44.29,7.11) 44.81,6.59 ; v1(44.29,7.11) 44.81,7.63 ; v1(52.71,29.8) 53.23,30.32 ; v1(52.71,29.8) 53.23,29.28 ; v1(52.71,29.8) 52.19,29.28 ; v1(52.71,29.8) 52.19,30.32 ; v1(43.74,23.65) 44.27,24.17 ; v1(43.74,23.65) 44.27,23.13 ; v1(43.74,23.65) 43.22,24.17 ; 95.57,34.43 J6.2 ; J6.2 96.97,34.43 ; J6.2 95.57,35.83 ; J6.2 96.97,35.83 ; 43.26,42.4 v1(43.78,42.92) 43.78,42.27
  BOTTOM w0.254: C27.1 C30.1 ; C25.1 76.78,20.95 v1(75.58,19.75) ; C48.1 43.78,43.68 v1(43.78,42.92) ; C24.1 76.92,31.87 76.5,31.45 v1(76.5,29.54) 76.5,28.91 76.54,28.87 76.54,25.78 77.56,24.76 C26.1
  BOTTOM w0.406: C13.1 43.27,25.39 43.74,24.92 v1(43.74,23.65) ; R39.2 v1(71.08,7.23) ; R35.2 v1(53.18,7.11) ; R41.2 v1(44.29,7.11) ; C23.1 74.77,18.93 v1(75.58,19.75) ; C15.1 54.2,29.8 v1(52.71,29.8) ; R28.2 R33.2 24.93,16 24.93,16 v1(24.22,16) ; C30.1 68.67,17.52 v1(68.67,18.28) ; R37.2 v1(62.19,7.23) ; R24.2 v1(24.84,9) ; v1(38.4,20.78) 40.69,20.78 41.11,21.2 C14.1 ; R26.2 v1(24.78,11.25) ; C12.1 v1(43.27,28.06) ; R34.2 v1(40.8,12.5)
VDD5V: length 114.6
  TOP w0.406: U21.3 43.75,46.69 ; U6.4 v1(22.94,17.63) ; v1(33.36,47.49) 34.25,47.49 L2.2 ; U6.16 v1(28.52,21.44)
  TOP w0.508: L2.2 37.31,48.5 37.94,47.87 v1(37.94,38.98) ; L2.2 35.26,48.88 33.35,50.79 v1(28.16,50.79) ; L2.2 35.26,45.83 34.51,45.08 v1(33.36,45.08) ; v1(35.14,33.9) 31.84,33.9 29.43,31.49 29.43,22.35 v1(28.52,21.44) ; D2.1 27.65,42.29 28.16,42.79 v1(28.16,44.32) ; U9.3 44.27,41 v1(44.79,41.52) 46.19,41.52 TP6.1 47.46,45.59 46.55,46.5 U21.3 ; v1(43.78,48.76) 43.78,48.05 43.75,48.02 43.75,46.69 44.67,47.61 v1(44.67,50.29)
  BOTTOM w0.406: v1(28.52,21.44) 26.87,21.44 26.25,20.82 26.25,20.54 26.25,20.54 C11.1 26.25,19.5 26.25,18.28 25.6,17.63 v1(22.94,17.63) ; C47.1 v1(44.79,41.52) ; 43.4,50.03 C93.1 v1(44.67,50.29) ; v1(33.36,47.49) C4.1
  BOTTOM w0.508: v1(37.94,38.98) 37.94,36.7 v1(35.14,33.9) ; v1(28.16,44.32) C3.2 C4.1 ; R3.2 v1(28.16,50.79) ; v1(43.78,48.76) 43.4,49.14 43.4,50.03 42.25,48.89 38.06,48.89 37.3,48.13 37.3,45.46 36.67,44.83 35.01,44.83 33.49,46.35 C4.1 ; C4.1 v1(33.36,45.08)
VDD15V: length 156.7
  TOP w0.254: U16.8 v1(88.6,41.4) ; U14.8 86.69,51.67 v1(87.59,52.57) ; U10.8 v1(72.12,59.4) ; U17.8 v1(72.36,41.4) ; U20.7 v1(58.32,44.63) ; U18.8 v1(24.35,36.7)
  TOP w0.406: v1(24.47,32) 24.47,29.71 25.03,29.15 U19.8 ; TP2.1 47.46,49.78 46.06,51.18 36.52,51.18 U2.3 34.44,54.92 34,55.37 v1(33.24,55.37) ; v1(57.9,57.25) 57.9,55.59 58.58,54.9 U15.8 ; U13.8 v1(71.6,50.41)
  TOP w0.508: U2.3 v1(34.44,52) ; U2.3 v1(35.86,53.25) ; U2.3 v1(33.15,53.25) ; v1(23.08,48.5) v1(23.08,47.23) ; v1(23.08,48.5) U4.5 ; v1(23.08,48.5) v1(23.08,51.04) ; U11.8 v1(88.07,59.4)
  POWER w0.406: v1(33.24,55.37) 32.35,55.37
  POWER w0.508: 87.55,59.93 v1(88.07,59.4) ; v1(88.07,59.4) 88.6,58.88 ; v1(88.07,59.4) 88.6,59.93 ; v1(88.07,59.4) 87.55,58.88 ; 57.37,56.73 v1(57.9,57.25) ; v1(57.9,57.25) 58.42,57.77 ; v1(57.9,57.25) 57.37,57.77 ; v1(57.9,57.25) 58.42,56.73 ; 23.19,52.71 v1(23.71,52.19) ; v1(23.71,52.19) 24.23,52.71 ; v1(23.71,52.19) 23.19,51.67 ; v1(23.71,52.19) 24.23,51.67 ; v1(24.35,36.7) 24.87,37.22 ; v1(24.35,36.7) 23.82,37.22 ; v1(24.35,36.7) 24.87,36.18 ; v1(24.35,36.7) 23.82,36.18 ; 22.56,49.02 v1(23.08,48.5) ; v1(23.08,48.5) 23.61,49.02 ; v1(23.08,48.5) 23.61,47.98 ; 58.84,45.16 v1(58.32,44.63) 58.84,44.11 ; 22.56,50.52 v1(23.08,51.04) ; v1(23.08,51.04) 23.61,51.56 ; v1(23.08,51.04) 22.56,51.56 ; v1(33.24,55.37) 33.76,55.89 ; v1(33.24,55.37) 32.71,54.85 ; v1(33.24,55.37) 32.71,55.89 ; v1(33.24,55.37) 33.76,54.85 ; 87.07,52.05 v1(87.59,52.57) ; v1(87.59,52.57) 87.07,53.09 ; v1(87.59,52.57) 88.11,52.05 ; v1(87.59,52.57) 88.11,53.09 ; 88.08,41.93 v1(88.6,41.4) ; v1(88.6,41.4) 88.08,40.88 ; v1(88.6,41.4) 89.12,40.88 ; v1(88.6,41.4) 89.12,41.93 ; v1(33.15,53.25) 33.67,53.77 ; v1(33.15,53.25) 32.63,52.73 ; v1(33.15,53.25) 33.67,52.73 ; v1(33.15,53.25) 32.63,53.77 ; v1(23.08,47.23) 23.61,47.75 ; v1(23.08,47.23) 22.56,46.71 ; v1(23.08,47.23) 23.61,46.71 ; v1(72.36,41.4) 72.88,41.93 ; v1(72.36,41.4) 72.88,40.88 ; v1(72.36,41.4) 71.84,41.93 ; v1(72.36,41.4) 71.84,40.88 ; v1(71.6,50.41) 72.12,50.93 ; v1(71.6,50.41) 71.08,50.93 ; v1(71.6,50.41) 71.08,49.88 ; v1(35.86,53.25) 36.38,53.77 ; v1(35.86,53.25) 35.34,52.73 ; v1(35.86,53.25) 35.34,53.77 ; v1(35.86,53.25) 36.38,52.73 ; 33.92,52.52 v1(34.44,52) ; v1(34.44,52) 34.97,52.52 ; v1(34.44,52) 33.92,51.48 ; v1(72.12,59.4) 72.65,59.93 ; v1(72.12,59.4) 71.6,59.93 ; v1(72.12,59.4) 72.65,58.88 ; v1(72.12,59.4) 71.6,58.88 ; v1(87.34,61.97) 87.34,60.83 ; 88.23,60.95 v1(88.23,61.97) ; 25,32.52 v1(24.47,32) 25.12,32 ; 46.76,48.58 TP2.1 48.16,48.58
  BOTTOM w0.254: v1(72.12,59.4) 68.88,59.4 C52.2 ; v1(58.32,44.63) 57.49,45.46 57.49,47.75 58,48.25 C92.2 ; C86.2 77.16,41.5 76.04,40.38 73.38,40.38 v1(72.36,41.4) ; C88.2 23.85,41 24.35,40.51 v1(24.35,36.7) ; C1.1 v1(23.71,52.19) R1.1 ; v1(87.59,52.57) 88.23,52.57 88.4,52.75 C77.2 ; C84.2 90.12,41.4 v1(88.6,41.4)
  BOTTOM w0.406: C90.2 v1(24.47,32) ; v1(71.6,50.41) 71.6,52.18 71.03,52.75 C74.2 ; C81.2 v1(57.9,57.25) ; v1(33.24,55.37) 33.24,56.26 33.25,56.27 C6.1
  BOTTOM w0.635: C55.2 R74.1 C70.1 90.26,67.58 90.25,67.59 R57.1 C44.1
  BOTTOM w1.016: C55.2 v1(88.23,61.97) v1(87.34,61.97)
